# Altium PCB PCB2.PcbDoc (part 1 of 2)
Units mil, origin at the board's own origin, x right, y up, seen from the top; angles counter-clockwise.
Board outline 3622.05 x 2165.35 mil, 4 copper layers (Top Layer, GND, Sign, Bottom Layer), stack 41.556 mil thick; 166 components, 110 nets, 600 pads, 640 vias.
Unrouted connection lines stored in the file: 2.
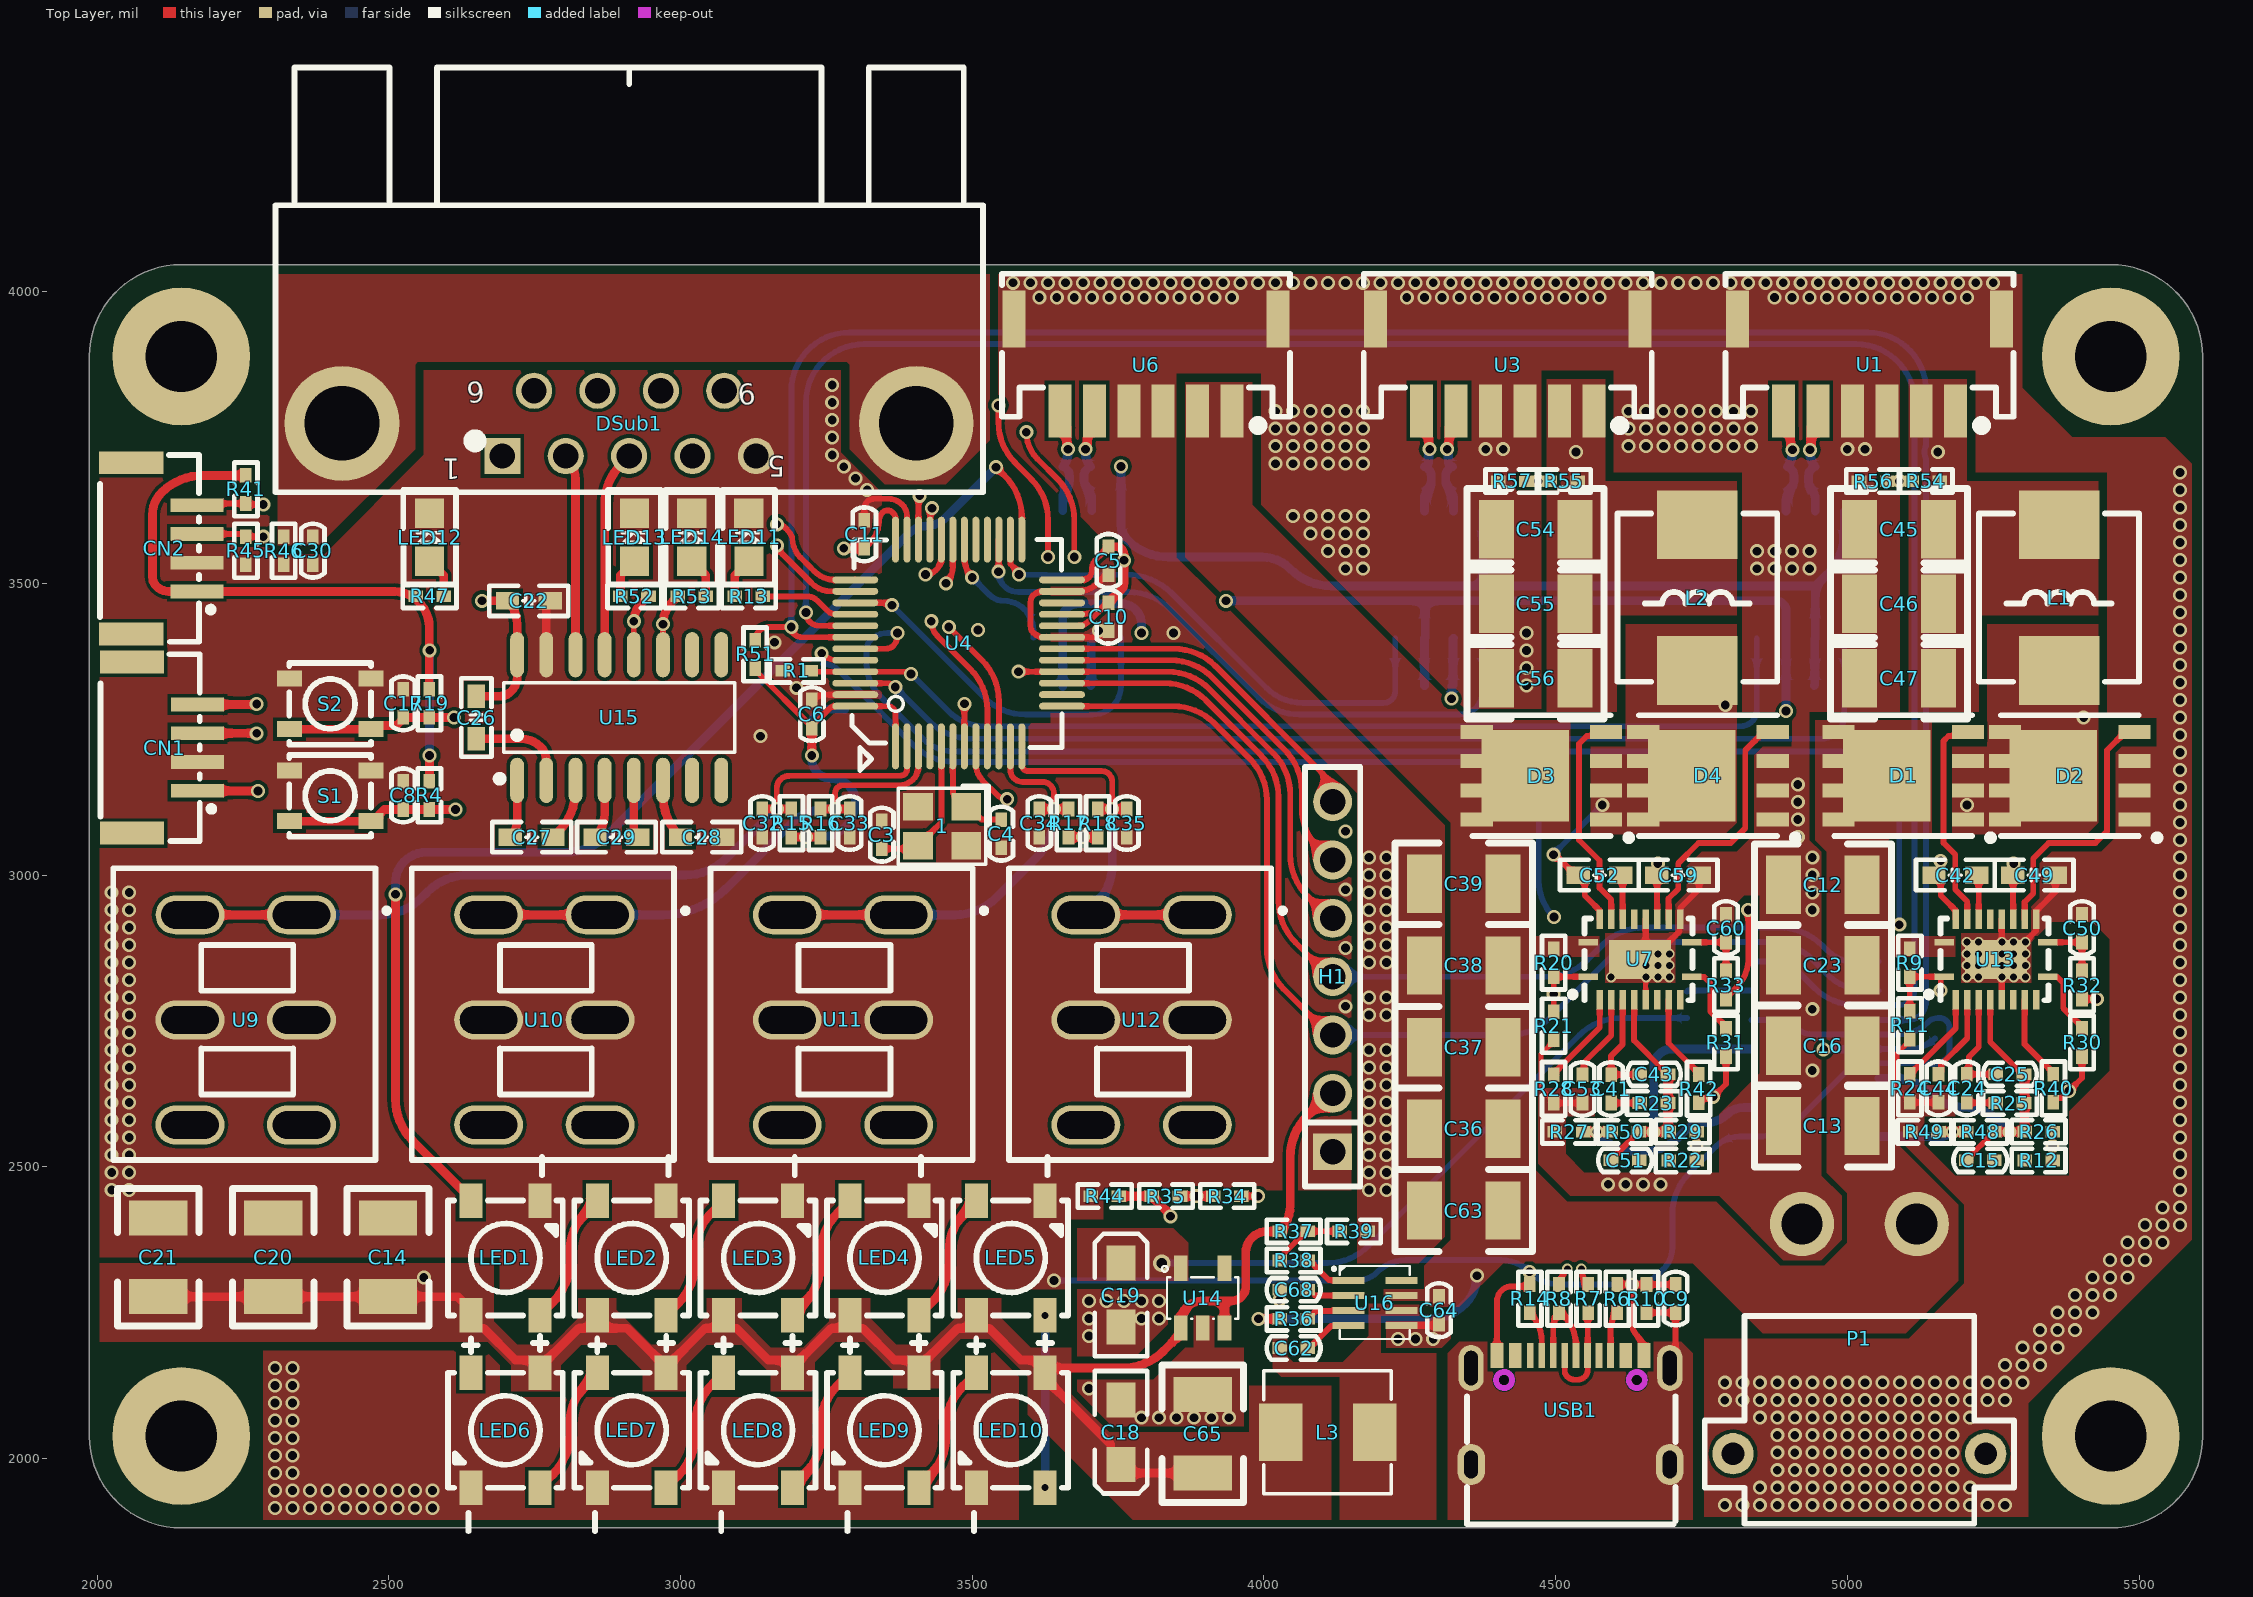
[diagram p0: Top Layer view]
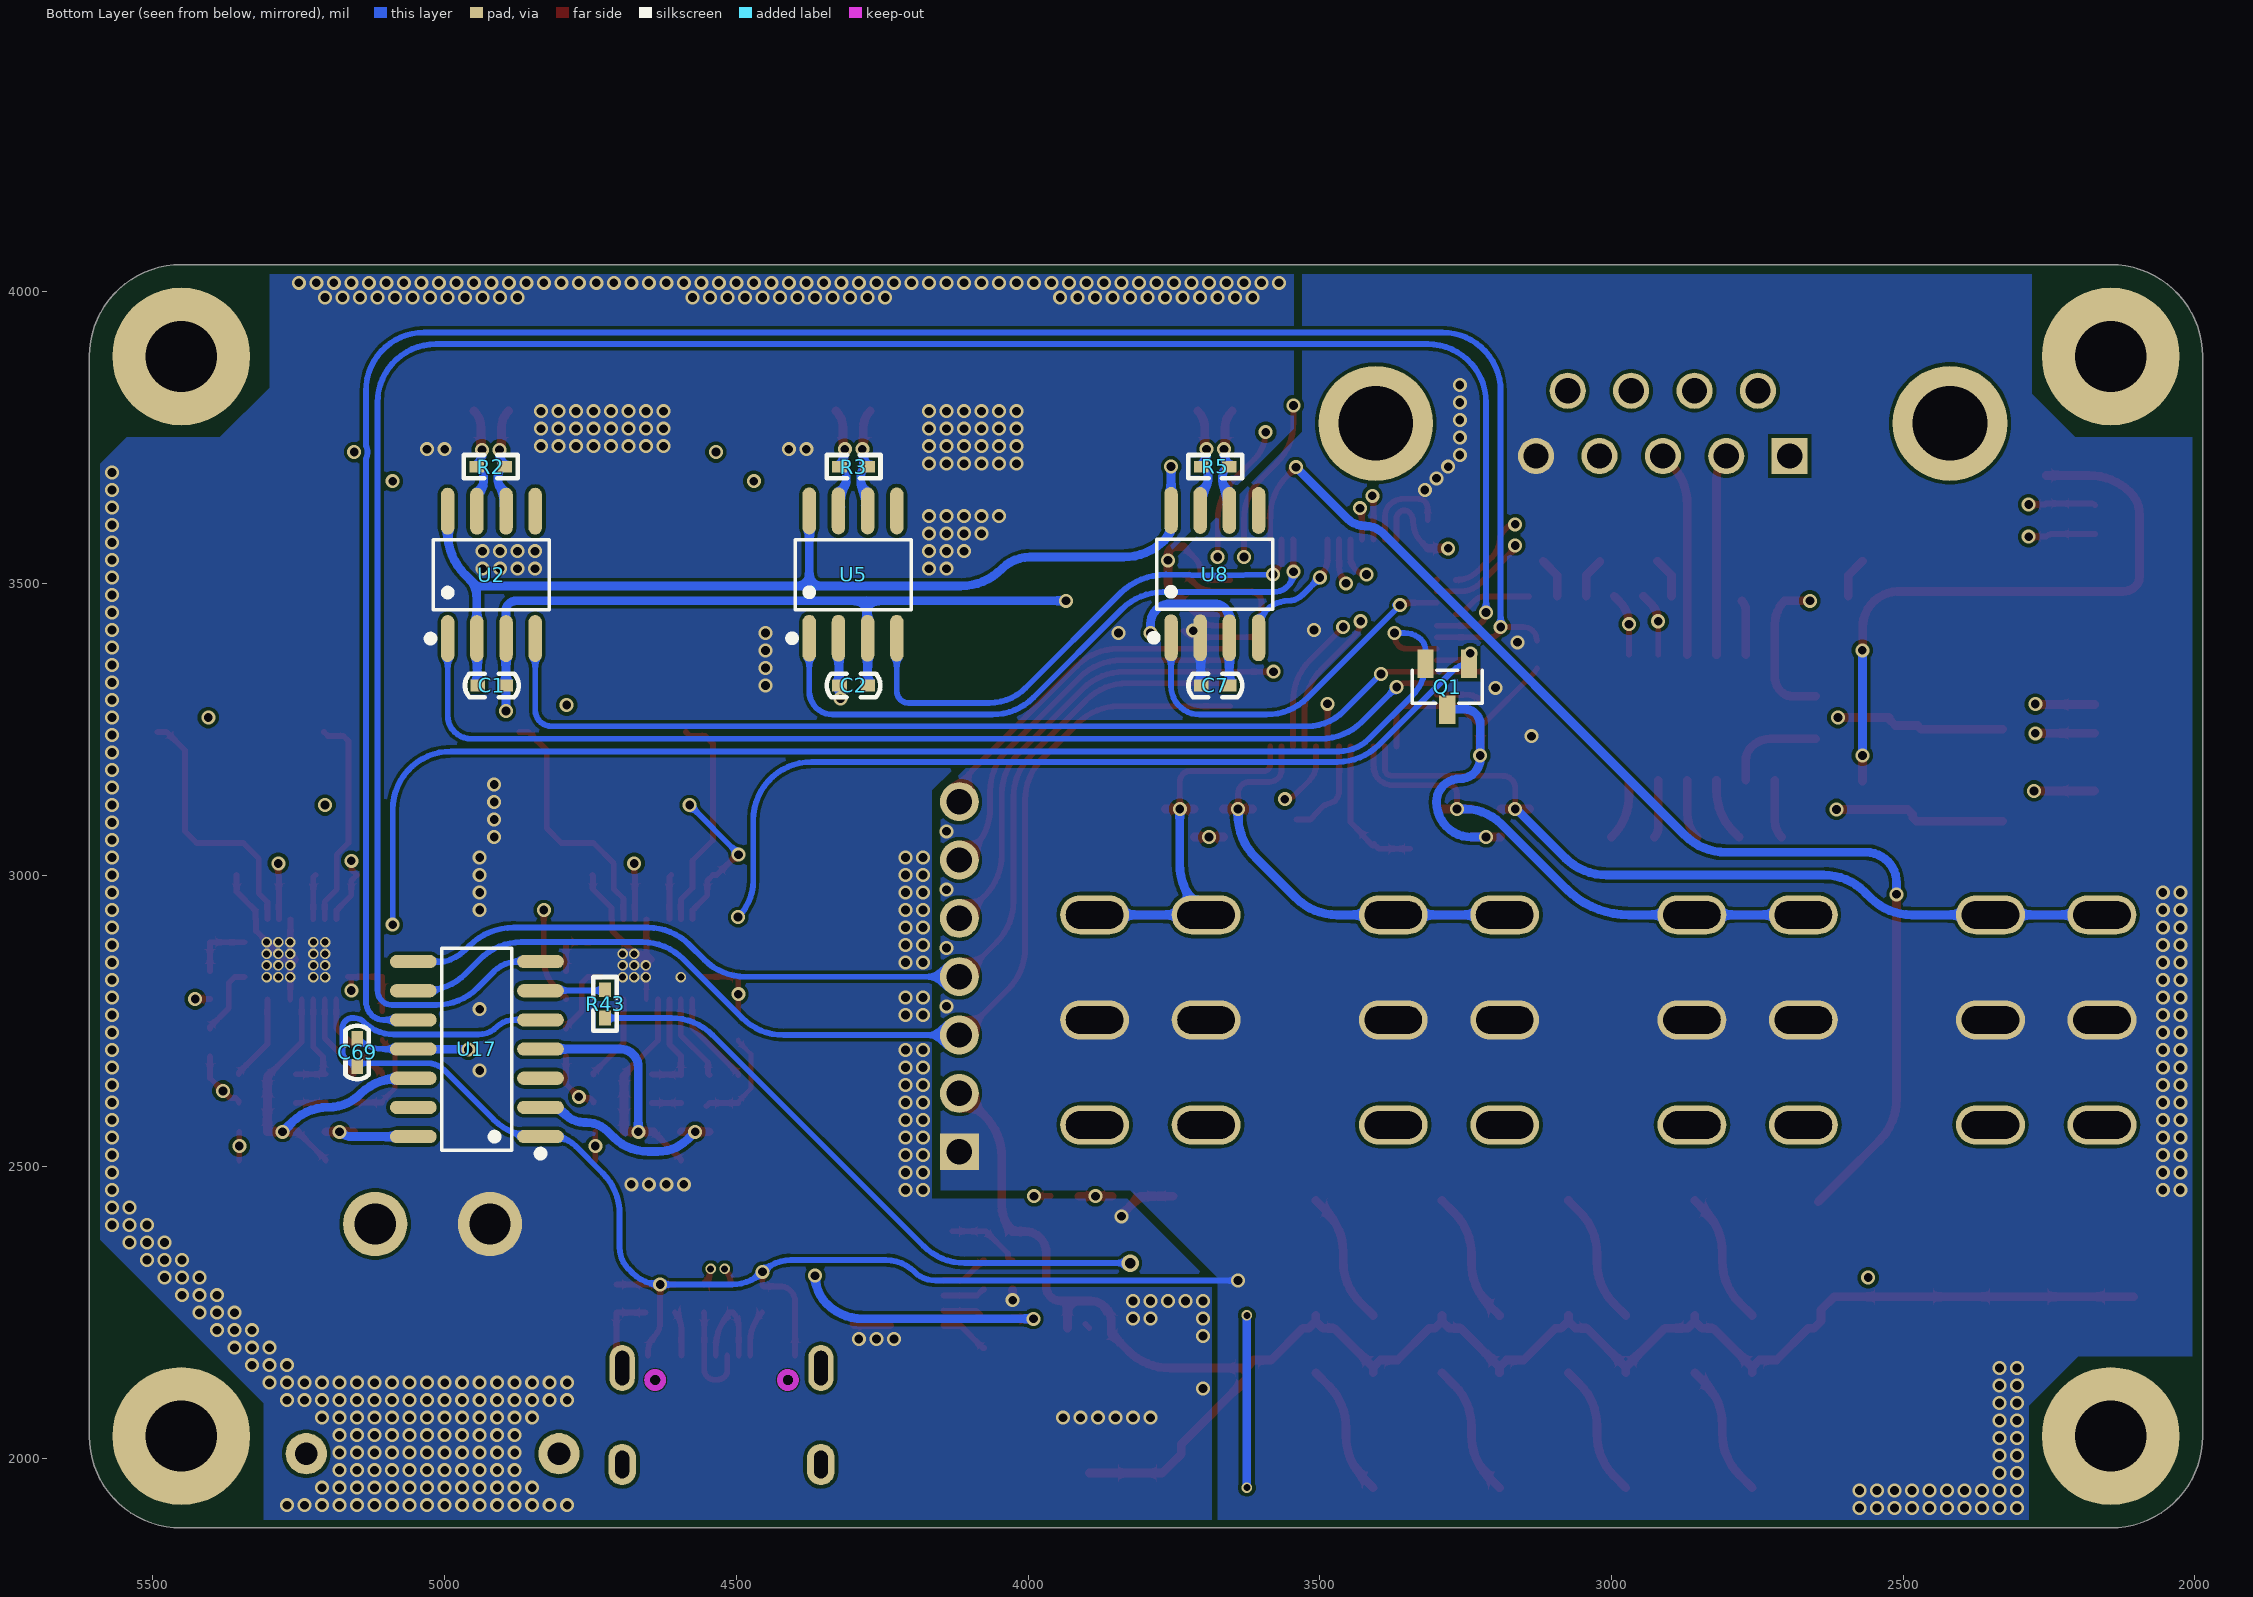
[diagram p1: Bottom Layer view, seen from below]
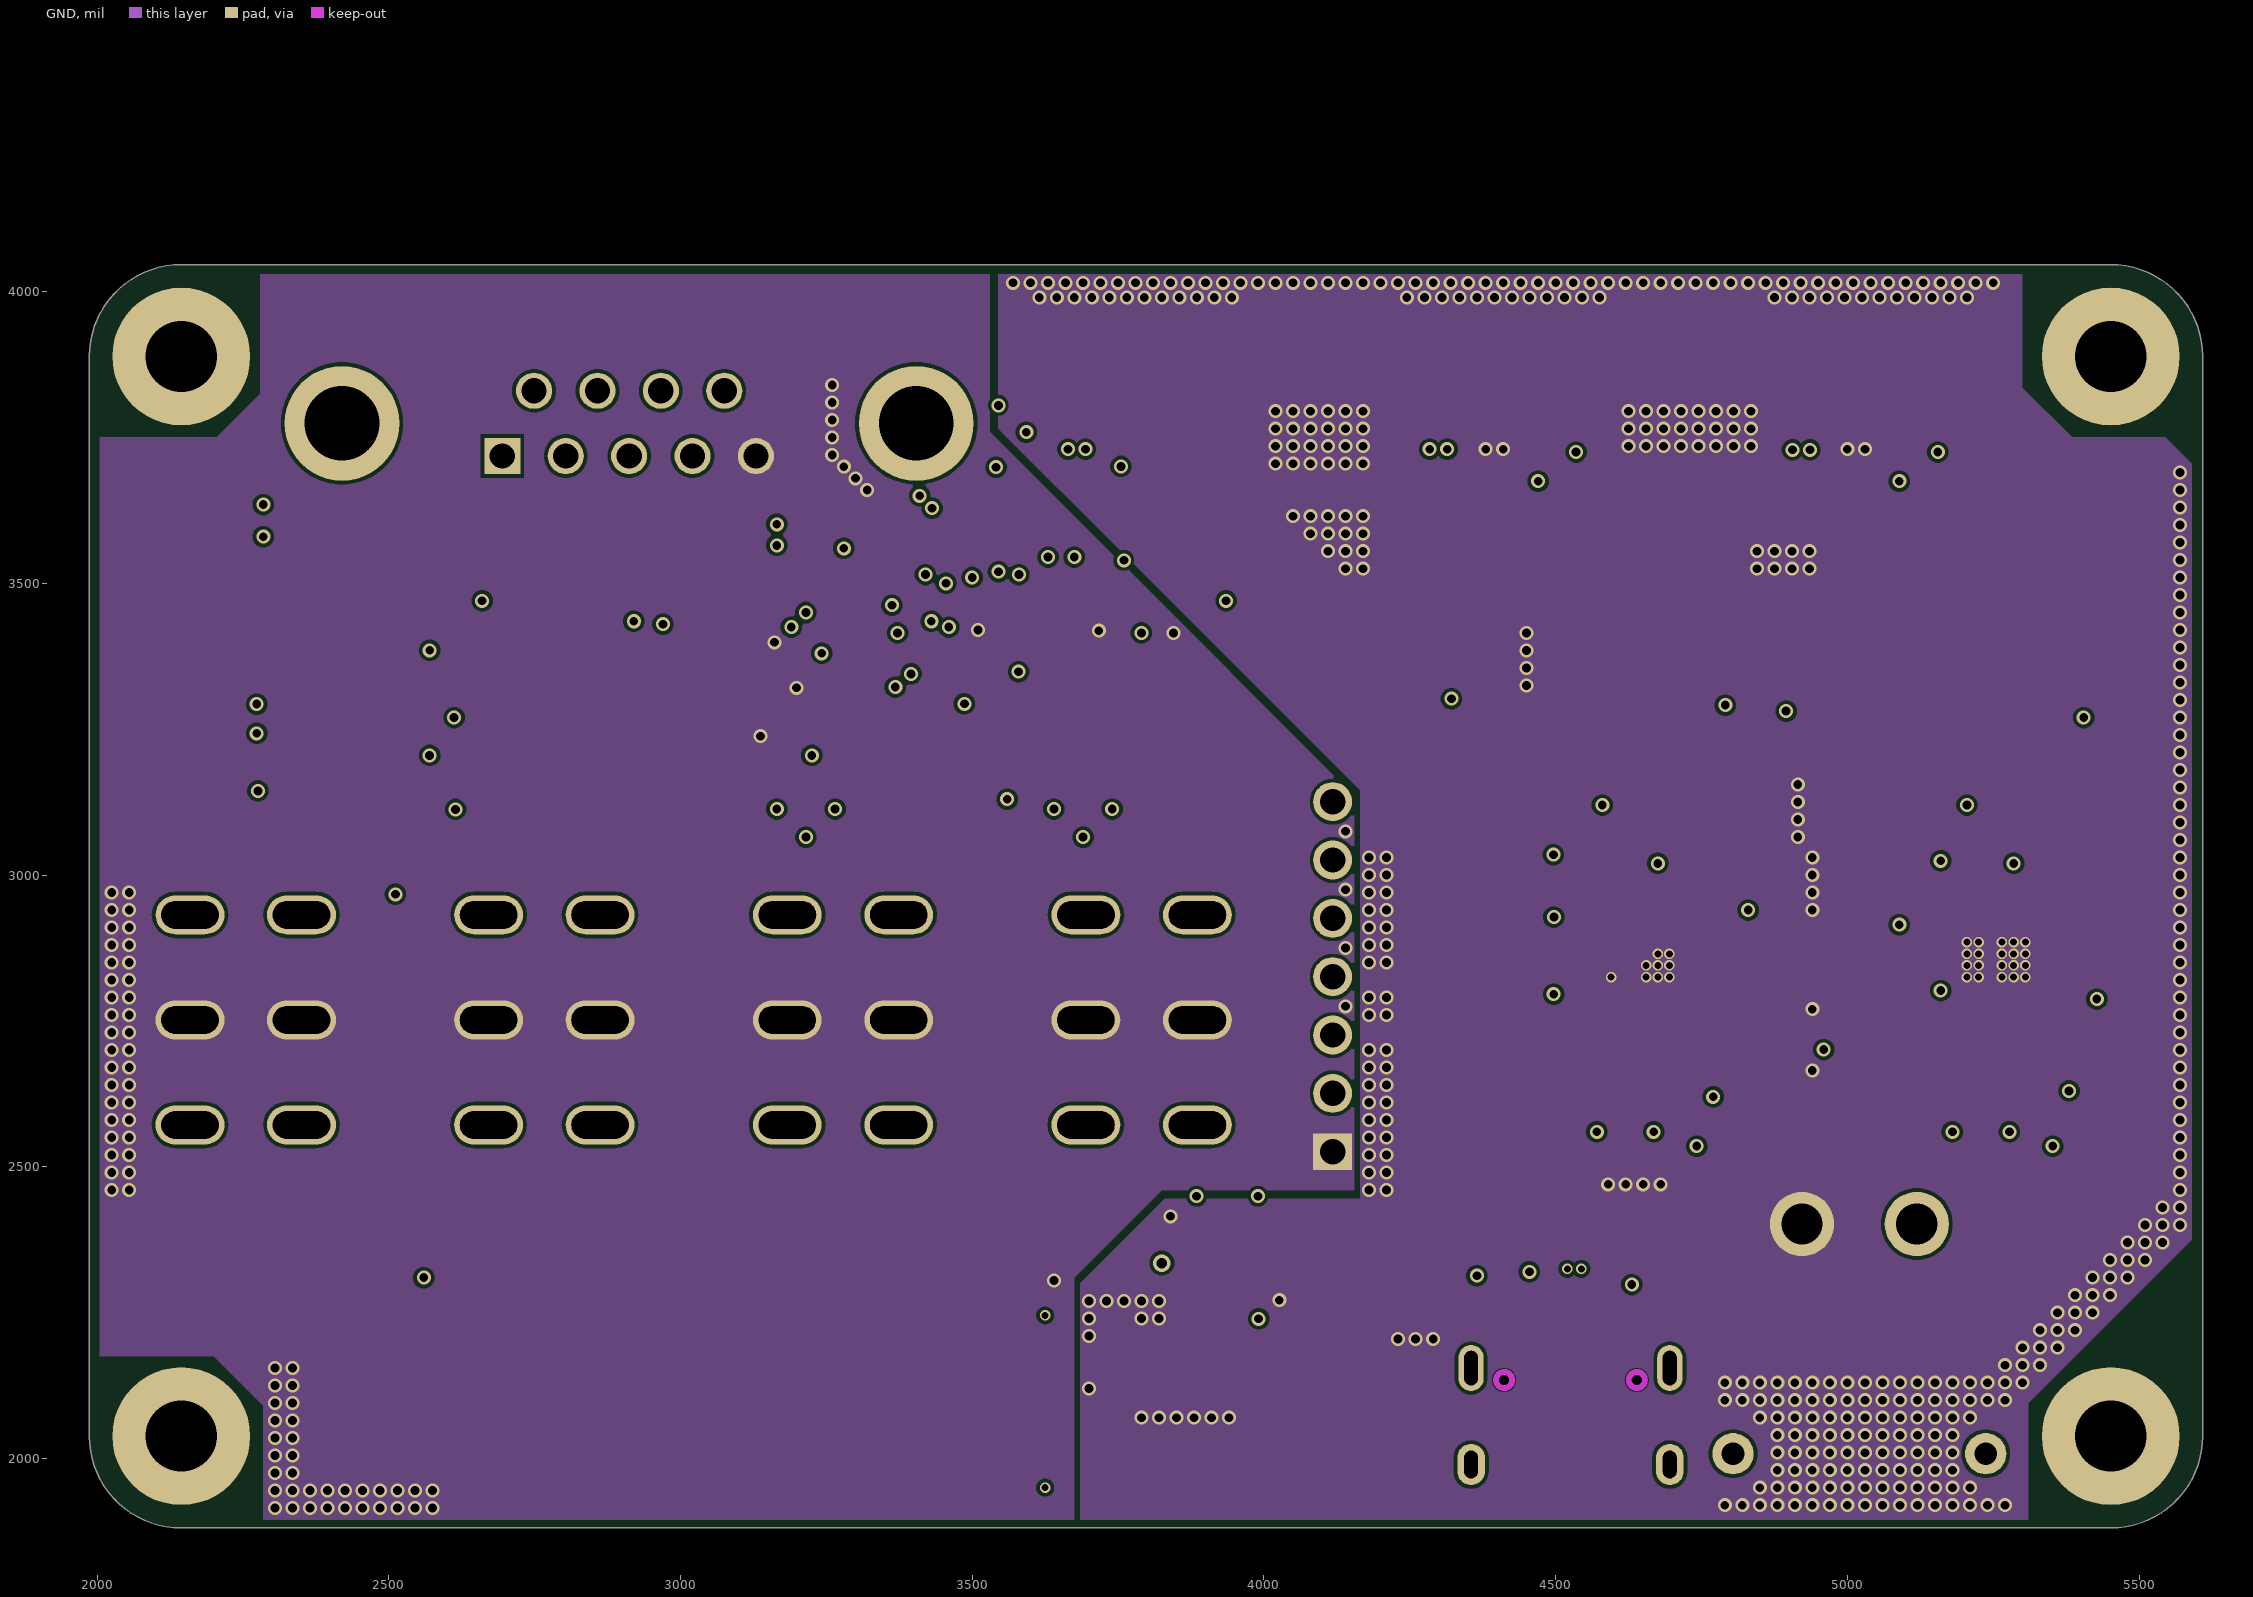
[diagram p2: GND]
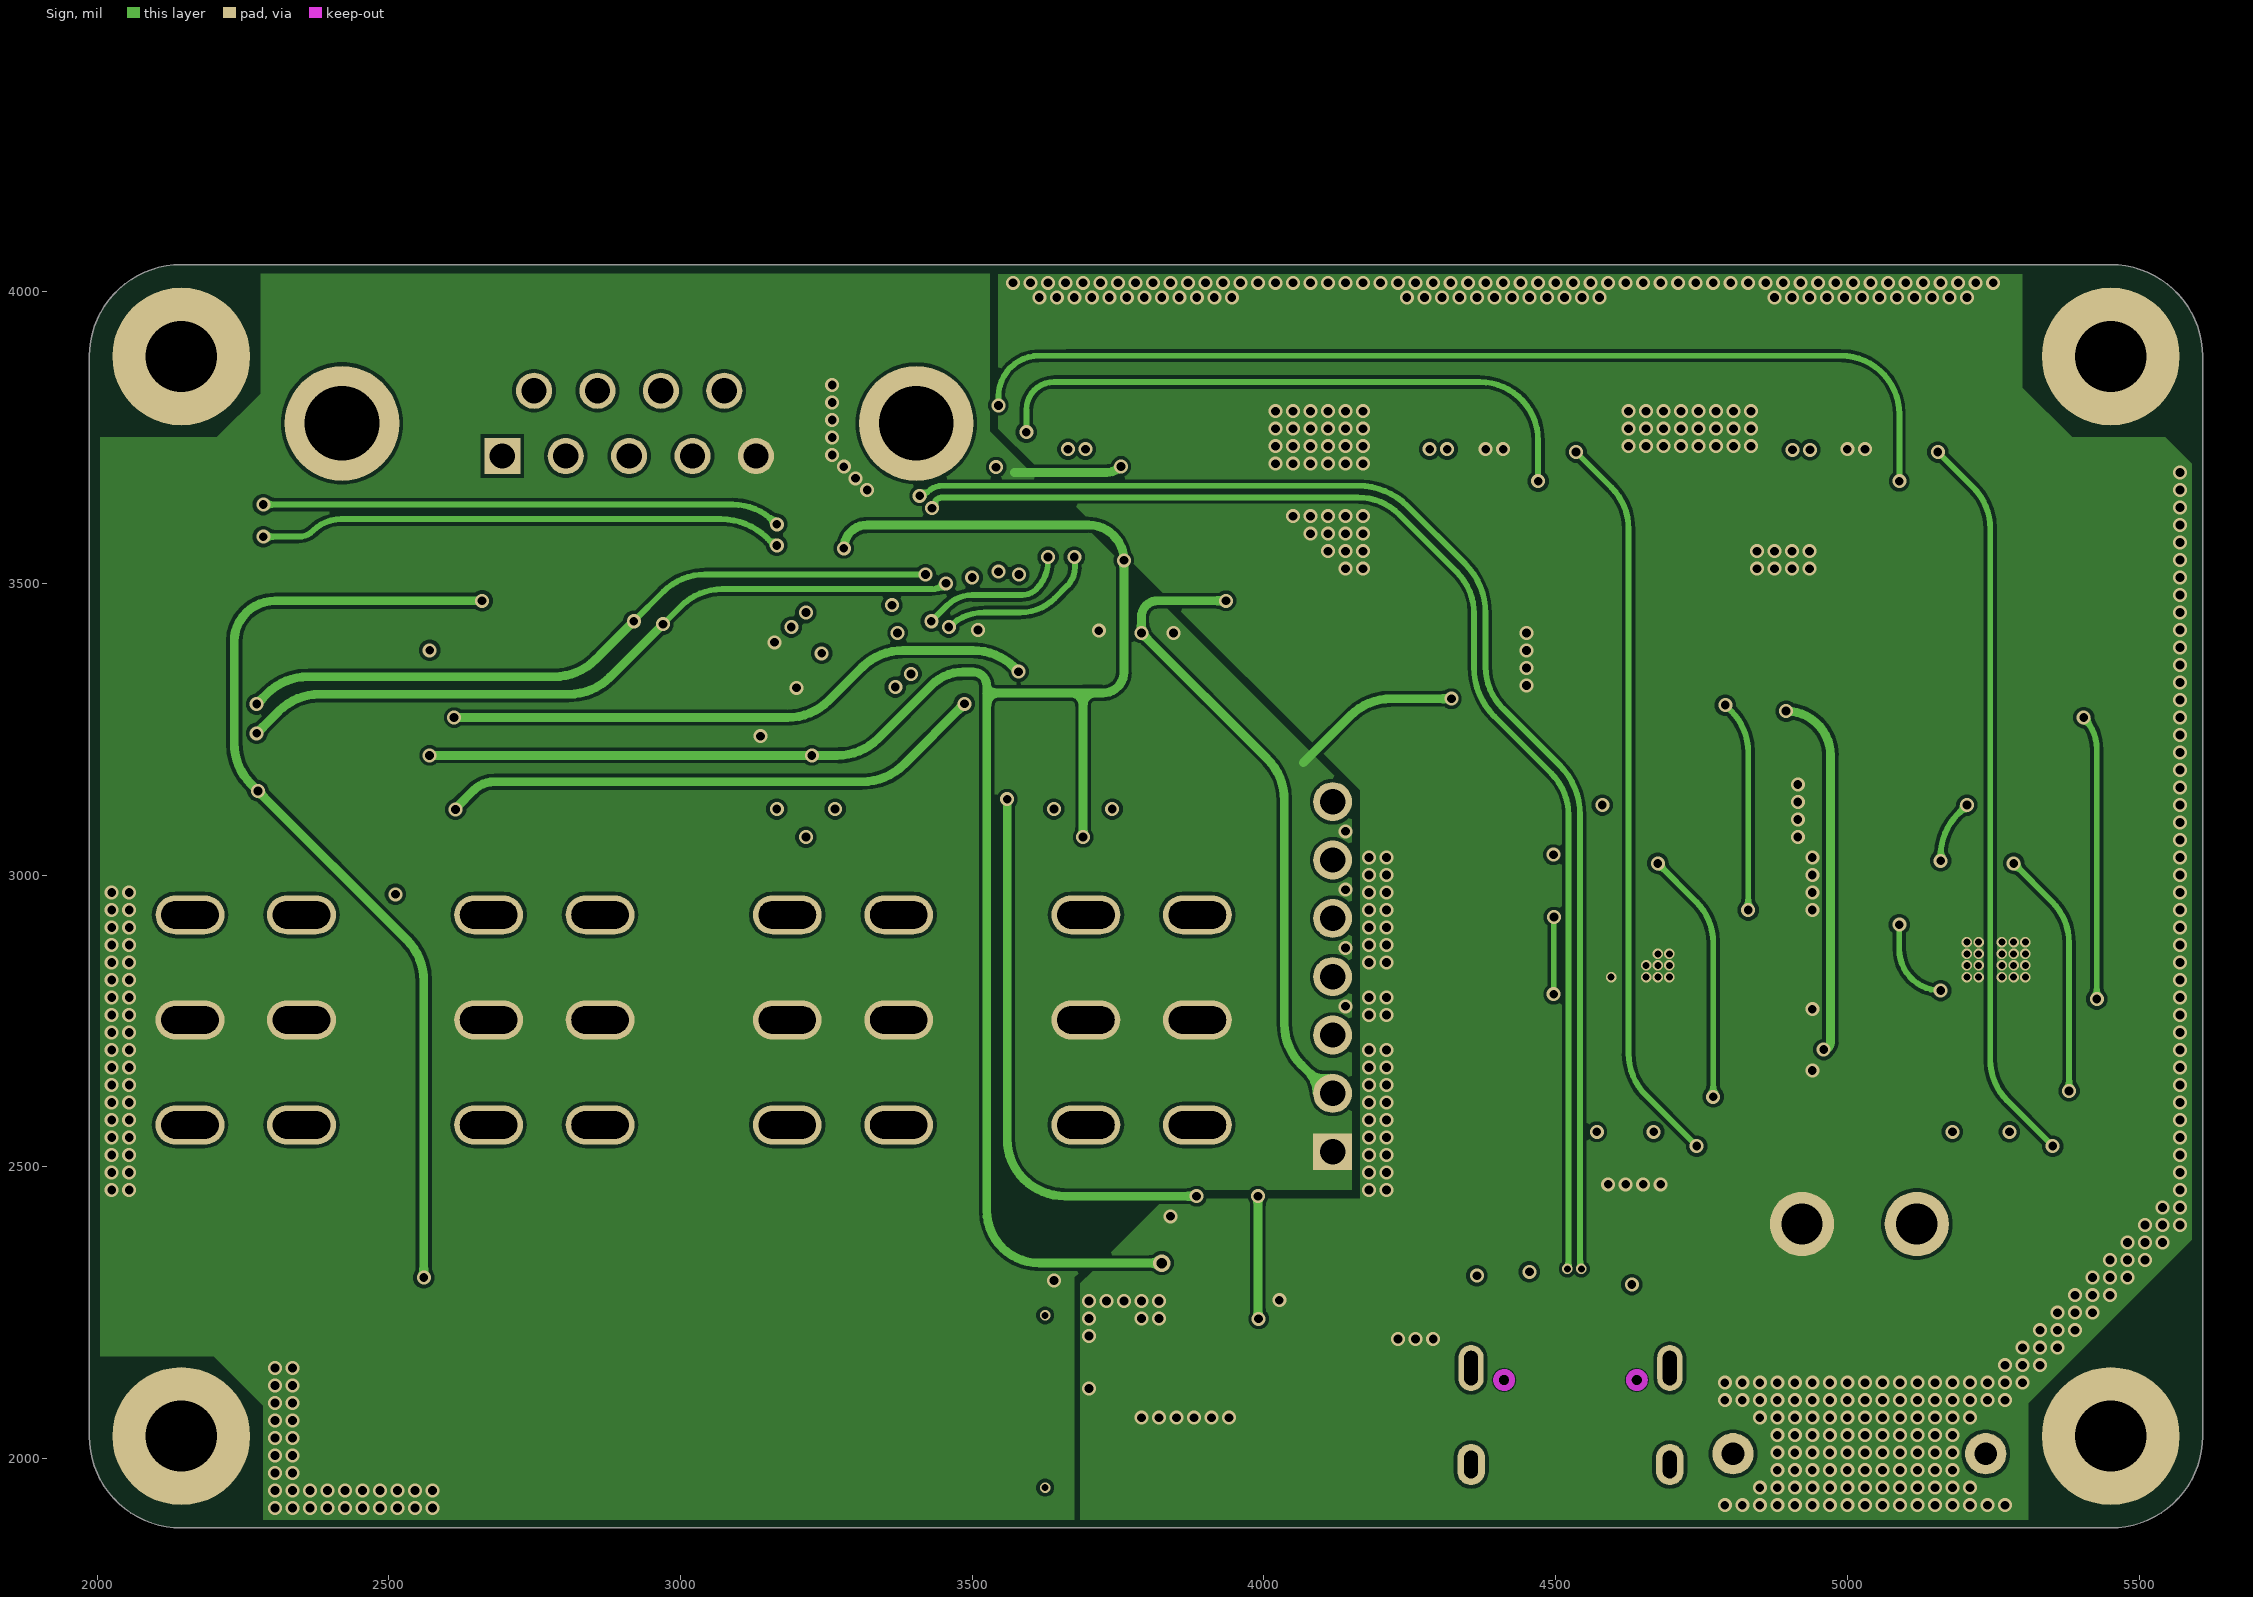
[diagram p3: Sign]
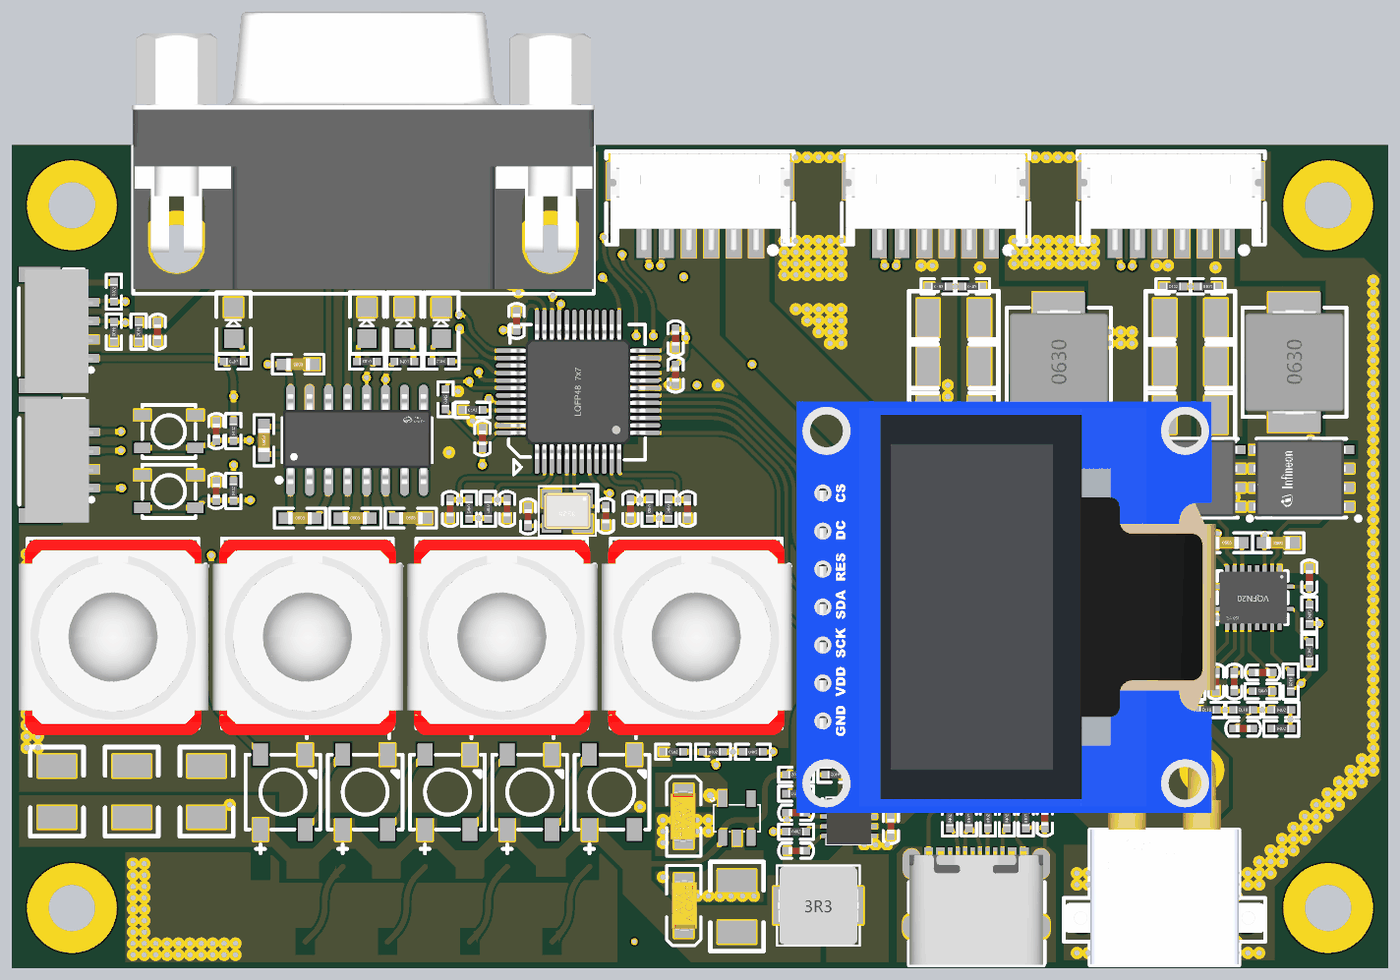
[diagram p5: 3D render of the assembled board from above, using the file's embedded part models]
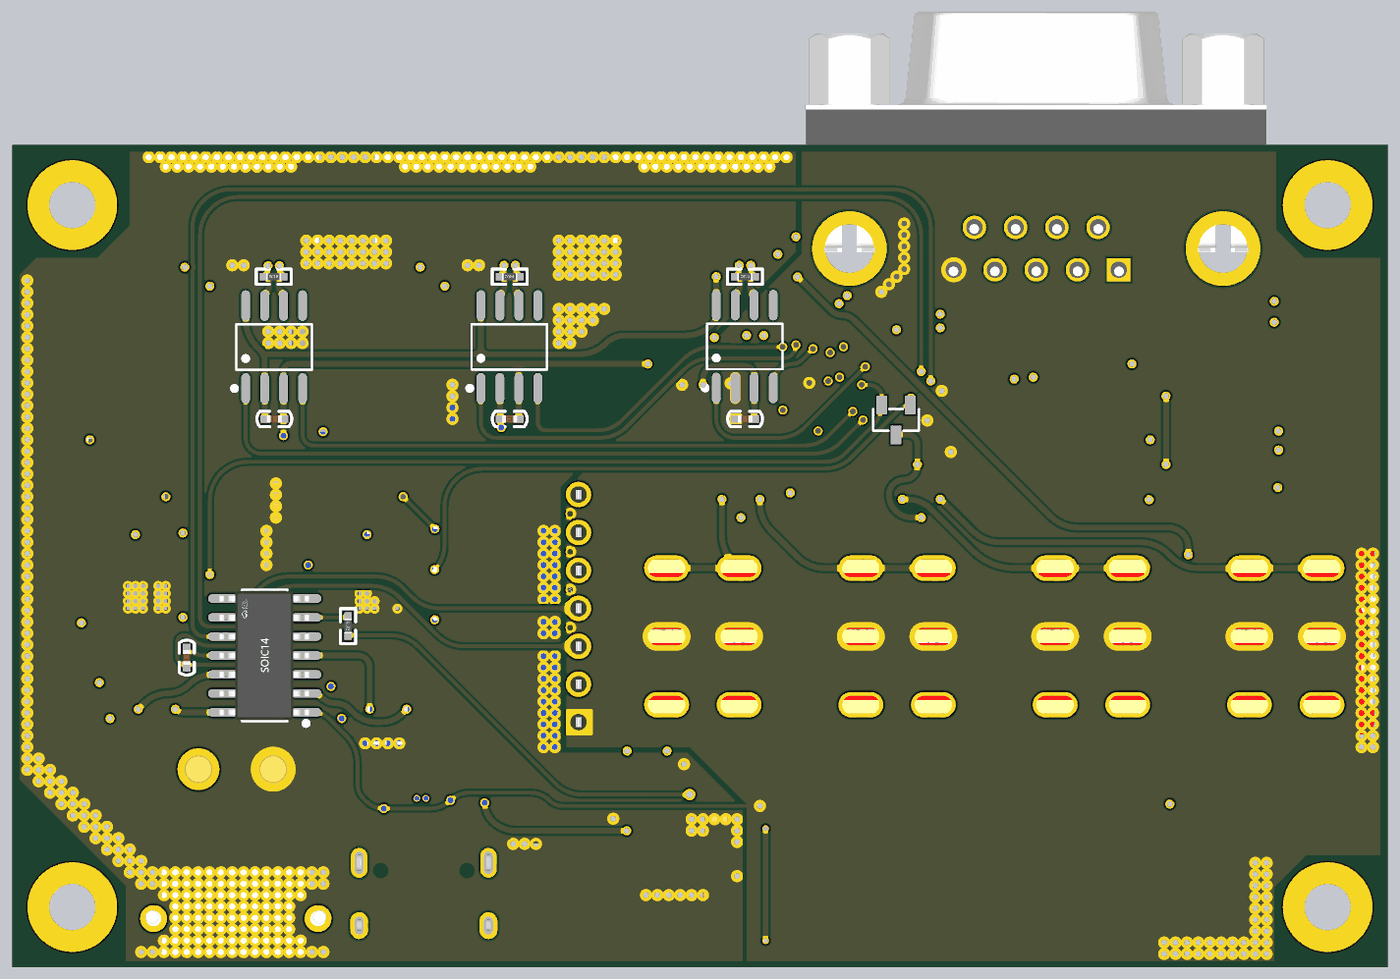
[diagram p6: 3D render of the assembled board from below, using the file's embedded part models]

## Layer stack, top to bottom
Top Solder: solder mask 0.4, Solder Resist, Dk 3.5
Top Layer: signal copper 1.4
Dielectric 2: prepreg 12, PP-006, Dk 4.1
GND: signal copper 1.378
Dielectric 1: dielectric 12, FR-4, Dk 4.8
Sign: signal copper 1.378
Dielectric 3: prepreg 12, PP-006, Dk 4.1
Bottom Layer: signal copper 1.4
Bottom Solder: solder mask 0.4, Solder Resist, Dk 3.5

## Board outline
5451.42,1880.91 2144.33,1880.91 cw(c2144.33,2038.39) 1986.85,2038.39 1986.85,3888.78 cw(c2144.33,3888.78) 2144.33,4046.26 5451.42,4046.26 cw(c5451.42,3888.78) 5608.9,3888.78 5608.9,2038.39 cw(c5451.42,2038.39)

## Design rules (kind name [scope] priority, off if disabled: settings)
AssemblyTestpoint AssemblyTestpoint_1 [All] p2: testpointundercomponent=TRUE minsize=40 maxsize=100 preferedsize=60 minholesize=0 maxholesize=40 preferedholesize=32 testpointgrid=1 usegrid=TRUE gridtolerance=0.01 allowsidetop=TRUE allowsidebottom=TRUE
Clearance [All] p1: gap=6 ignorepadtopadclearanceinfootprint=FALSE
DiffPairsRouting [All] p1: maxlimit=10 minlimit=8 mostfreqgap=10 toplayer_minwidth=10 toplayer_maxwidth=15 toplayer_prefwidth=15 midlayer1_minwidth=10 midlayer1_maxwidth=15 midlayer1_prefwidth=15 midlayer2_minwidth=10 midlayer2_maxwidth=15 midlayer2_prefwidth=15 bottomlayer_minwidth=10 bottomlayer_maxwidth=15 bottomlayer_prefwidth=15 maxuncoupledlength=500
Height [All] p1: minheight=0 maxheight=5000 prefheight=500
HoleSize [All] p1: absolutevalues=TRUE maxlimit=400 minlimit=1 maxpercent=80.000 minpercent=20.000
HoleToHoleClearance [All] p1: gap=5 allowstackedmicrovias=TRUE
MinimumSolderMaskSliver [All] p1: minsoldermaskwidth=0
NetAntennae [InNet('No Net')] p1: netantennaetolerance=0
PlaneConnect [All] p1: planeconnectstyle=Direct reliefexpansion=20 reliefentries=4 reliefconductorwidth=10 reliefairgap=10
PolygonConnect [All] p1: connectstyle=Direct reliefconductorwidth=10 reliefentries=4 polygonreliefangle="90 Angle" airgapwidth=10
RoutingVias [All] p1: holewidth=15 width=24 viastyle="Through Hole" minholewidth=12 minwidth=18 maxholewidth=30 maxwidth=50
SilkToSilkClearance [All] p1: silktosilkclearance=0
SilkToSolderMaskClearance [IsPad] p1: minsilkscreentomaskgap=0 clearancetoexposedcopper=TRUE
SolderMaskExpansion [All] p1: expansion=4 istentingtop=FALSE
UnRoutedNet [All] p1: checkbadconnections=TRUE
Width [All] p1: maxlimit=15 minlimit=8 preferedwidth=10
20 further rules are at their usual default settings.

## Classes and differential pairs
component class Power: C12 C13 C15 C16 C18 C19 C22 C23 C24 C25 C26 C27 C28 C29 C30 C36 C37 C38 C39 C41 C42 C43 C44 C45 C46 C47 C49 C50 C51 C52 C53 C54 C55 C56 C59 C60 C62 C63 C64 C65 C68 C69 D1 D2 D3 D4 DSub1 L1 L2 L3 LED12 LED13 LED14 P1 Q1 R9 R11 R12 R20 R21 R22 R23 R24 R25 R26 R27 R28 R29 R30 R31 R32 R33 R36 R37 R38 R39 R40 R42 R43 R44 R46 R47 R48 R49 R50 R51 R52 R53 U7 U13 U14 U15 U16 U17
component class Main: 1 C1 C2 C3 C4 C5 C6 C7 C8 C9 C10 C11 C14 C17 C20 C21 C32 C33 C34 C35 CN1 CN2 H1 LED1 LED2 LED3 LED4 LED5 LED6 LED7 LED8 LED9 LED10 LED11 R1 R2 R3 R4 R5 R6 R7 R8 R10 R13 R14 R15 R16 R17 R18 R19 R34 R35 R41 R45 R54 R55 R56 R57 S1 S2 U1 U2 U3 U4 U5 U6 U8 U9 U10 U11 U12 USB1
differential pair USB: +USB_P -USB_N
differential pair FDCAN3: +FDCAN3_P -FDCAN3_N
differential pair FDCAN2: +FDCAN2_P -FDCAN2_N
differential pair FDCAN1: +FDCAN1_P -FDCAN1_N

## Components (designator, comment, footprint, x,y, rotation, side; value= is the part's Value field where it differs from the comment)
1 "3225贴片晶振" OSC-3225-4P 3448.46,3083.85 r180 top value=16M
C1 "100nF" c0402 4895,3325 r0 bottom
C2 "100nF" c0402 4275,3325 r0 bottom
C3 "15pF" c0402 3345,3093.2 r270 top
C4 "15pF" c0402 3550,3046.8 r90 top
C5 "100nF" c0402 3733.46,3514.35 r90 top
C6 "100nF" c0402 3225,3300 r270 top
C7 "100nF" c0402 3655,3325 r0 bottom
C8 "100nF" c0402 2524.56,3160.59 r270 top
C9 "100nF" c0402 4705.63,2250 r90 top
C10 "100nF" c0402 3733.46,3418.65 r90 top
C11 "100nF" c0402 3315,3560 r90 top
C12 "10uF" 1210 4890.39,2983.27 r0 top
C13 "10uF" 1210 4890.39,2569.88 r0 top
C14 "10uF" 1210 2498.66,2412.4 r270 top
C15 "820pF" c0402 5252,2511 r180 top
C16 "10uF" 1210 4890.39,2707.68 r0 top
C17 "100nF" c0402 2524.56,3318.39 r270 top
C18 "10uF" 3216 3755,1990 r270 top
C19 "10uF" 3216 3755,2335 r90 top
C20 "10uF" 1210 2301.81,2412.4 r270 top
C21 "10uF" 1210 2104.96,2412.4 r270 top
C22 "1uF" "C 0603_M" 2740,3470 r180 top
C23 "10uF" 1210 4890.39,2845.47 r0 top
C24 "5.6nF" c0402 5204.34,2658.46 r270 top
C25 "82pF" c0402 5302.77,2658.46 r180 top
C26 "1uF" "C 0603_M" 2650,3270 r90 top
C27 "1uF" "C 0603_M" 2745,3065 r0 top
C28 "1uF" "C 0603_M" 3036.5,3065 r0 top
C29 "1uF" "C 0603_M" 2890,3065 r0 top
C30 "100nF" c0402 2370,3580 r270 top
C32 "100nF" c0402 3140,3065 r90 top
C33 "100nF" c0402 3290,3065 r90 top
C34 "100nF" c0402 3615,3065 r90 top
C35 "100nF" c0402 3765,3065 r90 top
C36 "10uF" 1210 4275,2565 r0 top
C37 "10uF" 1210 4275,2705 r0 top
C38 "10uF" 1210 4275,2845 r0 top
C39 "10uF" 1210 4275,2985 r0 top
C41 "5.6nF" c0402 4595.12,2657.45 r270 top
C42 "100nF" "C 0603_M" 5185,3000 r0 top
C43 "82pF" c0402 4692.53,2658.46 r180 top
C44 "47nF" c0402 5156.14,2658.46 r270 top
C45 "22uF" 1210 5021.14,3592.72 r0 top
C46 "22uF" 1210 5021.14,3464.92 r0 top
C47 "22uF" 1210 5021.14,3337.13 r0 top
C49 "2.2uF" "C 0603_M" 5320,3000 r180 top
C50 "12pF" c0402 5402.2,2933.04 r270 top
C51 "820pF" c0402 4643,2511 r180 top
C52 "100nF" "C 0603_M" 4575,3000 r0 top
C53 "47nF" c0402 4545.91,2657.45 r270 top
C54 "22uF" 1210 4398.27,3592.72 r0 top
C55 "22uF" 1210 4398.27,3464.92 r0 top
C56 "22uF" 1210 4398.27,3337.13 r0 top
C59 "2.2uF" "C 0603_M" 4710,3000 r180 top
C60 "12pF" c0402 4791.97,2933.04 r270 top
C62 "100nF" c0402 4075,2189.37 r180 top
C63 "10uF" 1210 4275,2425 r0 top
C64 "100nF" c0402 4300,2230 r90 top
C65 "10uF" 1210 3895,2110 r270 top
C68 "100nF" c0402 4026.8,2289.37 r0 top
C69 "100nF" c0402 5150,2671.8 r90 bottom
CN1 "卧式UART" CONN-SMD_4P-P1.25_GH1.25-4P 2116.1,3218.35 r270 top
CN2 "卧式STLINK" CONN-SMD_4P-P1.25_GH1.25-4P 2115,3560 r270 top
D1 "CSD18540" pg-tdson-8 4986.62,3120.28 r90 top
D2 "CSD18540" pg-tdson-8 5272.05,3120.28 r90 top
D3 "CSD18540" pg-tdson-8 4366.54,3120.28 r90 top
D4 "CSD18540" pg-tdson-8 4651.97,3120.28 r90 top
DSub1 "DMR-9S" DSUB-TH_DMR-9S 2912.01,4022.68 r90 top locked
H1 "PM254V-11-07-H85" HDR-TH_7P-P2.54-V-F 4117.83,2825.79 r90 top locked
L1 "5.6uH" L-SMD-0630 5362.83,3475.39 r90 top
L2 "5.6uH" L-SMD-0630 4742.76,3475.39 r90 top
L3 "22uH" IND-SMD_L5.4-W5.2 4109.29,2045 r0 top value=10uH
LED1 "XL-5050RGBC-WS2812B" LED-SMD_4P-L5.0-W5.0-BL_XL-5050RGBC 1980.55,2927.24 r0 top
LED2 "XL-5050RGBC-WS2812B" LED-SMD_4P-L5.0-W5.0-BL_XL-5050RGBC 2197.09,2927.24 r0 top
LED3 "XL-5050RGBC-WS2812B" LED-SMD_4P-L5.0-W5.0-BL_XL-5050RGBC 2413.62,2927.24 r0 top
LED4 "XL-5050RGBC-WS2812B" LED-SMD_4P-L5.0-W5.0-BL_XL-5050RGBC 2630.15,2927.24 r0 top
LED5 "XL-5050RGBC-WS2812B" LED-SMD_4P-L5.0-W5.0-BL_XL-5050RGBC 2846.7,2927.24 r0 top
LED6 "XL-5050RGBC-WS2812B" LED-SMD_4P-L5.0-W5.0-BL_XL-5050RGBC 3419.22,1464.8 r180 top
LED7 "XL-5050RGBC-WS2812B" LED-SMD_4P-L5.0-W5.0-BL_XL-5050RGBC 3635.75,1464.8 r180 top
LED8 "XL-5050RGBC-WS2812B" LED-SMD_4P-L5.0-W5.0-BL_XL-5050RGBC 3852.28,1464.8 r180 top
LED9 "XL-5050RGBC-WS2812B" LED-SMD_4P-L5.0-W5.0-BL_XL-5050RGBC 4068.82,1464.8 r180 top
LED10 "XL-5050RGBC-WS2812B" LED-SMD_4P-L5.0-W5.0-BL_XL-5050RGBC 4285.36,1464.8 r180 top
LED11 "LED" led0805 3117.2,3537.7 r90 top
LED12 "LED" led0805 2570,3537.7 r90 top
LED13 "LED" led0805 2921.2,3537.7 r90 top
LED14 "LED" led0805 3019.4,3537.7 r90 top
P1 "XT30PW-M" XT30PW-M 5020.63,2205 r0 top
Q1 "SS8050" SOT-23-3_L2.9-W1.3-P1.90-LS2.4-BR 3436.45,3103.65 r90 bottom
R1 "10KΩ" R0402 3175,3350 r0 top
R2 "120Ω" R0402 4896.8,3700 r0 bottom
R3 "120Ω" R0402 4275,3700 r0 bottom
R4 "10KΩ" R0402 2569.56,3112.39 r90 top
R5 "120Ω" R0402 3655,3700 r0 bottom
R6 "5.1KΩ" R0402 4605.63,2250 r90 top
R7 "22Ω" R0402 4555.63,2250 r90 top
R8 "22Ω" R0402 4505.63,2250 r90 top
R9 "56KΩ" R0402 5106.93,2873.99 r270 top
R10 "10KΩ" R0402 4655.63,2250 r90 top
R11 "11KΩ" R0402 5106.93,2718.53 r90 top
R12 "100Ω" R0402 5303.78,2510.83 r0 top
R13 "2KΩ" R0402 3141.2,3477.7 r180 top
R14 "5.1KΩ" R0402 4455.63,2250 r90 top
R15 "10KΩ" R0402 3190,3113.2 r270 top
R16 "10KΩ" R0402 3240,3113.2 r270 top
R17 "10KΩ" R0402 3665,3113.2 r270 top
R18 "10KΩ" R0402 3715,3113.2 r270 top
R19 "10KΩ" R0402 2569.56,3270.19 r90 top
R20 "80.6KΩ" R0402 4496.69,2873.99 r270 top
R21 "7.5KΩ" R0402 4496.69,2717.52 r90 top
R22 "100Ω" R0402 4693.54,2510.83 r0 top
R23 "10KΩ" R0402 4692.53,2609.25 r180 top
R24 "23.7KΩ" R0402 5106.93,2658.46 r270 top
R25 "10KΩ" R0402 5302.77,2609.25 r180 top
R26 "56KΩ" R0402 5303.78,2560.04 r0 top
R27 "4KΩ" R0402 4547,2560 r180 top
R28 "23.7KΩ" R0402 4496.69,2657.45 r270 top
R29 "56KΩ" R0402 4693.54,2560.04 r0 top
R30 "20KΩ" R0402 5402.2,2737.2 r270 top
R31 "20KΩ" R0402 4791.97,2737.2 r270 top
R32 "499Ω" R0402 5402.2,2787.43 r90 top
R33 "499Ω" R0402 4791.97,2787.43 r90 top
R34 "10KΩ" R0402 3913.02,2449.68 r0 top
R35 "1KΩ" R0402 3808.02,2449.68 r0 top
R36 "10KΩ" R0402 4026.8,2239.37 r0 top
R37 "43KΩ" R0402 4075,2389.37 r180 top
R38 "51KΩ" R0402 4075,2339.37 r180 top
R39 "8.2KΩ" R0402 4178.2,2389.37 r180 top
R40 "100KΩ" R0402 5352.99,2658.46 r270 top
R41 "10KΩ" R0402 2255,3636.8 r90 top
R42 "100KΩ" R0402 4745,2658.2 r270 top
R43 "10KΩ" R0402 4725,2803.2 r270 bottom
R44 "0Ω" R0402 3703.02,2449.68 r0 top
R45 "10KΩ" R0402 2255,3580 r270 top
R46 "10KΩ" R0402 2320,3580 r270 top
R47 "2KΩ" R0402 2546,3477.7 r0 top
R48 "0" R0402 5252,2560 r180 top
R49 "2KΩ" R0402 5156.2,2560 r180 top
R50 "0KΩ" R0402 4642.2,2560 r180 top
R51 "10KΩ" R0402 3128,3354 r90 top
R52 "2KΩ" R0402 2945.2,3477.7 r180 top
R53 "2KΩ" R0402 2995.2,3477.7 r0 top
R54 "10KΩ" R0402 5110,3675 r0 top
R55 "10KΩ" R0402 4490,3675 r0 top
R56 "1KΩ" R0402 5020,3675 r0 top
R57 "1KΩ" R0402 4401.8,3675 r0 top
S1 "SW" KEY_SMD 2399.56,3135.59 r180 top
S2 "SW" KEY_SMD 2399.56,3293.39 r180 top
U1 "ZX-ZH1.5-6PWT" CONN-SMD_6P-P1.50_ZX-ZH1.5-6PWT 5038.04,3874.25 r180 top
U2 "SN65HVD1050DR" SOIC-8_L4.9-W3.9-P1.27-LS6.0-BL 4919.76,3514.45 r180 bottom
U3 "ZX-ZH1.5-6PWT" CONN-SMD_6P-P1.50_ZX-ZH1.5-6PWT 4417.95,3874.25 r180 top
U4 "STM32G474CET6" LQFP-48 2011.77,2292.72 r90 top
U5 "SN65HVD1050DR" SOIC-8_L4.9-W3.9-P1.27-LS6.0-BL 4300,3515 r180 bottom
U6 "ZX-ZH1.5-6PWT" CONN-SMD_6P-P1.50_ZX-ZH1.5-6PWT 3797.87,3874.25 r180 top
U7 "LM25145RGYR" VQFN-20_L4.5-W3.5-P0.50-BL-EP 4644.33,2855.4 r0 top
U8 "SN65HVD1050DR" SOIC-8_L4.9-W3.9-P1.27-LS6.0-BL 3680,3515.85 r180 bottom
U9 "7208P1YZQI" SW-TH_6P-L12.7-W11.4-P4.70-LS4.8 2262.44,2761.73 r180 top locked
U10 "7208P1YZQI" SW-TH_6P-L12.7-W11.4-P4.70-LS4.8 2774.25,2761.73 r180 top locked
U11 "7208P1YZQI" SW-TH_6P-L12.7-W11.4-P4.70-LS4.8 3286.06,2761.73 r180 top locked
U12 "7208P1YZQI" SW-TH_6P-L12.7-W11.4-P4.70-LS4.8 3797.87,2761.73 r180 top locked
U13 "LM25145RGYR" VQFN-20_L4.5-W3.5-P0.50-BL-EP 5254.57,2855.31 r0 top
U14 "XC6201P332MR-HXY" SOT-23-5_L3.0-W1.7-P0.95-LS2.8-BR 3895,2275 r270 top
U15 "MAX232ESE+T" SOIC-16_L9.9-W3.9-P1.27-LS6.0-BL 2890,3270 r0 top
U16 "MP9943" "QFN-8 3x3" 4145,2304.96 r0 top
U17 "AD8402ARZ10-REEL" SOIC-14_L8.7-W3.9-P1.27-LS6.0-BL 4944.66,2701.67 r90 bottom
USB1 "TYPE-C 16PIN 2MD(073)" USB-C-SMD_TYPE-C-6PIN-2MD-073 4525.35,2083.15 r0 top

## Footprints (in the part's own frame and the unit in brackets; to place one, negate y for a bottom-side part, rotate by r counter-clockwise, add the part's x,y. Pads: shape width x height; smd on the part's side, far side on the other; paste and mask are expansions set on the pad)
1210 [mil]
  rect 60x100 smd: 1(0,0) 2(135,0)
  silkscreen extent -50,-70 185,70, body extent 4,-49 130,49, height 30
3216 [mil]
  rect 60x50 smd: 1(0,0) 2(-110,0)
  silkscreen extent -160,-45 50,45, body extent -122,-31 12,35, height 67
c0402 [mil]
  rect 25x20 smd: 1(0,0) 2(48.2,0)
  silkscreen extent -22,-20 70,20, body extent 5,-10 44,10, height 20
"C 0603_M" [mil] "无极性贴片电容"
  rect 40x30 smd: 1(-36.5,0) 2(36.5,0)
  silkscreen extent -68,-26 68,26, body extent -31,-16 31,16, height 32
CONN-SMD_4P-P1.25_GH1.25-4P [mm]
  rect 0.6x2.3 smd mask+0.051: 1(1.875,1.425) 2(0.625,1.425) 3(-0.625,1.425) 4(-1.875,1.425)
  rect 1x2.8 smd mask+0.051: 5(-3.725,-1.425) 6(3.725,-1.425)
  silkscreen extent -4.06,-2.8 4.06,2.16, body extent -4.07,-2.4 4.19,2.15, height 4.13
CONN-SMD_6P-P1.50_ZX-ZH1.5-6PWT [mm]
  rect 1x2.3 smd paste+0 mask+0.05: 1(-3.75,2) 2(-2.25,2) 3(-0.75,2) 4(0.75,2) 5(2.25,2) 6(3.75,2)
  rect 1x2.5 smd paste+0 mask+0.05: 7(5.75,-2) 8(-5.75,-2)
  silkscreen extent -6.27,-3.97 6.27,3.04, body extent -6,-3.81 6.01,2.69, height 3.7
DSUB-TH_DMR-9S [mil]
  rect 62x62 hole 43.31 paste+0 mask+2: 1(-304.49,217.32)
  round 62 hole 43.31 paste+0 mask+2: 2(-304.49,108.66) 3(-304.49,0) 4(-304.49,-108.66) 5(-304.49,-217.32) 6(-192.68,162.99) 7(-192.68,54.33) 8(-192.68,-54.33) 9(-192.68,-162.99)
  round 196.85 hole 127.95 paste+0 mask+2: 10(-248.59,492.13) 11(-248.59,-492.12)
  silkscreen extent -367,-606 362,606, body extent -355,-608 374,608, height 498
HDR-TH_7P-P2.54-V-F [mm]
  rect 1.575x1.7 hole 1.1: 1(-7.62,0)
  round 1.7 hole 1.1: 2(-5.08,0) 3(-2.54,0) 4(0,0) 5(2.54,0) 6(5.08,0) 7(7.62,0)
  silkscreen extent -9.13,-1.2 9.13,1.2, body extent -13.63,-26.36 13.88,1.69, height 14.46
IND-SMD_L5.4-W5.2 [mm]
  rect 1.9x2.5 smd: 1(2.05,0) 2(-2.05,0)
  silkscreen extent -2.78,-2.68 2.78,2.68, body extent -2.7,-2.6 2.7,2.6, height 3.1
KEY_SMD [mm]
  rect 1.1x0.7 smd: 1(-1.775,-1.1) 1(1.775,-1.1) 2(-1.775,1.1) 2(1.775,1.1)
  silkscreen extent -1.78,-1.78 1.78,1.78, body extent -1.75,-1.35 1.75,1.35, height 1.6
L-SMD-0630 [mm] "一体化成型电感"
  rect 3x3.5 smd: 1(-3.175,0) 2(3.175,0)
  silkscreen extent -3.66,-3.48 3.66,3.48, body extent -3.47,-3.3 3.47,3.3, height 3.05
led0805 [mil] "1/8W"
  rect 50x50 smd: 1(0,0) 2(82.3,0.2)
  silkscreen extent -40,-45 122,45, body extent 2,-25 80,25, height 20
LED-SMD_4P-L5.0-W5.0-BL_XL-5050RGBC [mm]
  rect 1x1.5 smd: 1(16.771,-17.323) 2(19.771,-17.323) 3(19.771,-12.323) 4(16.771,-12.323)
  silkscreen extent 15.77,-18.92 20.77,-10.42, body extent 15.79,-17.56 20.79,-12.16, height 1.54
LQFP-48 [mm]
  oval 2x0.3 smd: 1(23.567,-34.461) 2(23.567,-34.961) 3(23.567,-35.461) 4(23.567,-35.961) 5(23.567,-36.461) 6(23.567,-36.961) 7(23.567,-37.461) 8(23.567,-37.961) 9(23.567,-38.461) 10(23.567,-38.961) 11(23.567,-39.461) 12(23.567,-39.961) 25(32.567,-39.961) 26(32.567,-39.461) 27(32.567,-38.961) 28(32.567,-38.461) 29(32.567,-37.961) 30(32.567,-37.461) 31(32.567,-36.961) 32(32.567,-36.461) 33(32.567,-35.961) 34(32.567,-35.461) 35(32.567,-34.961) 36(32.567,-34.461)
  oval 0.3x2 smd: 13(25.317,-41.711) 14(25.817,-41.711) 15(26.317,-41.711) 16(26.817,-41.711) 17(27.317,-41.711) 18(27.817,-41.711) 19(28.317,-41.711) 20(28.817,-41.711) 21(29.317,-41.711) 22(29.817,-41.711) 23(30.317,-41.711) 24(30.817,-41.711) 37(30.817,-32.711) 38(30.317,-32.711) 39(29.817,-32.711) 40(29.317,-32.711) 41(28.817,-32.711) 42(28.317,-32.711) 43(27.817,-32.711) 44(27.317,-32.711) 45(26.817,-32.711) 46(26.317,-32.711) 47(25.817,-32.711) 48(25.317,-32.711)
  silkscreen extent 22.51,-41.71 32.57,-32.57, body extent 23.56,-41.71 32.57,-32.71, height 1.45
OSC-3225-4P [mm] "3.2*2.5*0.7mm(长宽高)                             淘宝ID:黄晶宝石"
  rect 1.3x1.2 smd: 1(-1.05,-0.85) 2(1.05,-0.85) 3(1.05,0.85) 4(-1.05,0.85)
  silkscreen extent -2.03,-1.75 1.91,1.65, body extent -1.6,-1.25 1.6,1.25, height 0.7
pg-tdson-8 [mm]
  rect 0.61x1.4 smd: 1(3.175,-5.588) 2(-0.635,0.044) 2(0.635,0.044) 2(1.905,0.044) 2(3.175,0.044) 3(-0.635,-5.588) 3(0.635,-5.588) 3(1.905,-5.588)
  rect 4x3.81 smd: 2(1.27,-2.056)
  silkscreen extent -1.55,-6.7 3.9,0.23, body extent -1.43,-5.73 3.96,0.42, height 1.01
"QFN-8 3x3" [mm]
  rect 1.4x0.3 smd: 1(0,0) 2(0,-0.65) 3(0,-1.3) 4(0,-1.95) 5(2.3,-1.95) 6(2.3,-1.3) 7(2.3,-0.65) 8(2.3,0)
  silkscreen extent -0.64,-2.54 2.67,0.64, body extent -0.41,-2.53 2.69,0.57, height 0.94
R0402 [mil] "1/16W"
  rect 25x20 smd: 1(0,0) 2(48.2,0)
  silkscreen extent -22,-20 70,20, body extent 5,-10 44,10, height 14
SOIC-8_L4.9-W3.9-P1.27-LS6.0-BL [mm]
  oval 0.588x2.045 smd mask+0.051: 1(-1.905,-2.772) 2(-0.635,-2.772) 3(0.635,-2.772) 4(1.905,-2.772) 5(1.905,2.772) 6(0.635,2.772) 7(-0.635,2.772) 8(-1.905,2.772)
  silkscreen extent -2.8,-2.92 2.53,1.52, body extent -2.45,-3 2.45,3, height 1.75
SOIC-14_L8.7-W3.9-P1.27-LS6.0-BL [mil]
  oval 22.6x80.24 smd: 1(-150,-109.02) 2(-100,-109.02) 3(-50,-109.02) 4(0,-109.02) 5(50,-109.02) 6(100,-109.02) 7(150,-109.02) 8(150,109.02) 9(100,109.02) 10(50,109.02) 11(0,109.02) 12(-50,109.02) 13(-100,109.02) 14(-150,109.02)
  silkscreen extent -185,-115 173,60, body extent -169,-117 169,119, height 75
SOIC-16_L9.9-W3.9-P1.27-LS6.0-BL [mil]
  oval 23.7x77.6 smd paste+0 mask+2: 1(-169.99,-107.7) 2(-119.99,-107.7) 3(-69.99,-107.7) 4(-19.99,-107.7) 5(30.01,-107.7) 6(80.01,-107.7) 7(130.01,-107.7) 8(180.01,-107.7) 9(180.01,107.7) 10(130.01,107.7) 11(80.01,107.7) 12(30.01,107.7) 13(-19.99,107.7) 14(-69.99,107.7) 15(-119.99,107.7) 16(-169.99,107.7)
  silkscreen extent -206,-111 203,60, body extent -190,-115 200,121, height 75
SOT-23-3_L2.9-W1.3-P1.90-LS2.4-BR [mm]
  rect 1.25x0.7 smd: 1(6.562,-4.885) 2(6.562,-2.985) 3(4.562,-3.935)
  silkscreen extent 4.84,-5.46 6.29,-2.41, body extent 4.19,-5.39 6.99,-2.49, height 1.3
SOT-23-5_L3.0-W1.7-P0.95-LS2.8-BR [mm]
  rect 1.1x0.6 smd: 1(1.3,-0.95) 2(1.3,0) 3(1.3,0.95) 4(-1.3,0.95) 5(-1.3,-0.95)
  silkscreen extent -1.4,-1.78 0.9,1.55, body extent -1.5,-1.5 1.5,1.5, height 1.3
SW-TH_6P-L12.7-W11.4-P4.70-LS4.8 [mm]
  oval 3x1.7 hole 1.2 slot 2.5 at 0 deg: 1(-2.235,-4.318) 2(-2.235,0.255) 3(-2.235,4.827) 4(2.616,-4.318) 5(2.618,0.255) 6(2.618,4.827)
  silkscreen extent -6.05,-6.35 5.96,6.35, body extent -6.15,-6.3 6.56,6.8, height 41.07
USB-C-SMD_TYPE-C-6PIN-2MD-073 [mm]
  rect 0.55x1.1 smd paste-100 mask+0.05: 1(-3.2,2.375) 2(-2.4,2.375) 11(2.4,2.375) 12(3.2,2.375)
  rect 0.3x1.1 smd paste-100 mask+0.05: 3(-1.75,2.375) 4(-1.25,2.375) 5(-0.75,2.375) 6(-0.25,2.375) 7(0.25,2.375) 8(0.75,2.375) 9(1.25,2.375) 10(1.75,2.375)
  oval 1.2x1.8 hole 0.6 slot 1.2 at 90 deg paste+0 mask+0.05: 13(-4.325,-2.375) 14(4.325,-2.375)
  oval 1.1x2 hole 0.6 slot 1.5 at 90 deg paste+0 mask+0.05: 13(-4.325,1.825) 14(4.325,1.825)
  Keep-Out Layer board cut-out: -2.54,1.305 -2.589,1.477 -2.717,1.603 -2.89,1.649 -3.063,1.603 -3.191,1.477 -3.24,1.305 -3.24,1.305 -3.191,1.133 -3.063,1.007 -2.89,0.961 -2.717,1.007 -2.589,1.133 -2.54,1.305
  Keep-Out Layer board cut-out: 3.24,1.305 3.191,1.477 3.063,1.603 2.89,1.649 2.717,1.603 2.589,1.477 2.54,1.305 2.54,1.305 2.589,1.133 2.717,1.007 2.89,0.961 3.063,1.007 3.191,1.133 3.24,1.305
  Keep-Out Layer circle w0.025: c-2.89,1.305 r0.35
  Keep-Out Layer circle w0.254: c-2.89,1.305 r0.35
  Keep-Out Layer circle w0.025: c2.89,1.305 r0.35
  Keep-Out Layer circle w0.254: c2.89,1.305 r0.35
  silkscreen extent -4.5,-4.97 4.57,0.6, body extent -4.47,-4.93 4.47,2.65, height 3.36
VQFN-20_L4.5-W3.5-P0.50-BL-EP [mm]
  rect 0.85x0.28 smd: 1(-2.25,-0.752) 10(2.25,-0.752) 11(2.25,0.748) 20(-2.25,0.75)
  rect 0.28x0.85 smd: 2(-1.749,-1.75) 3(-1.248,-1.75) 4(-0.749,-1.75) 5(-0.248,-1.75) 6(0.251,-1.75) 7(0.752,-1.75) 8(1.251,-1.75) 9(1.752,-1.75) 12(1.752,1.75) 13(1.251,1.75) 14(0.75,1.748) 15(0.25,1.748) 16(-0.25,1.748) 17(-0.75,1.748) 18(-1.25,1.748) 19(-1.75,1.748)
  rect 2.7x1.7 smd: 21(0,-0.002)
  silkscreen extent -3.05,-1.78 2.29,1.78, body extent -2.26,-1.76 2.26,1.76, height 1
XT30PW-M [mm]
  round 1.8 hole 1: 0(-5.5,-5) 0(5.5,-5)
  round 2.8 hole 1.8: +(2.5,5) -(-2.5,5)
  silkscreen extent -6.73,-8.05 6.73,1, body extent -6.65,-8 6.65,5.95, height 5.29

## Part data
C1 C2 C3 C4 C5 C6 C7 C8 C9 C10 C11 C15 C17 C24 C25 C30 C32 C33 C34 C35 C41 C42 C43 C44 C50 C51 C52 C53 C60 C62 C64 C68 C69: library part 0402贴片电容, "贴片电容0402"
C12 C13 C14 C16 C20 C21 C23 C36 C37 C38 C39 C45 C46 C47 C54 C55 C56 C63 C65: library part 1210贴片电容, "1210贴片电容"
C18 C19: library part 3216钽电容, "3216钽电容"
C22 C26 C27 C28 C29 C49 C59: library part 0603贴片电容, "0603贴片电容"
D1 D2 D3 D4: "N沟道MOS管", ComponentLink1Description="Manufacturer Link", ComponentLink1URL=http://www.irf.com/, DatasheetVersion=PD-9.814, LatestRevisionDate=17-Jul-2002, LatestRevisionNote="Re-released for DXP Platform.", Note="Pin 2 is electrically connected to pin 4.", PackageDescription="TO, Thru-Hole, Vertical, Heatsink Mounted; 3 In-Line Leads; Pitch 2.54 mm", PackageReference=TO-220AB, PackageVersion=Feb-1997, Published=8-Jun-2000, Publisher="Altium Limited"
H1: Current Rating (Max)=3A, JLCPCB Part Class="Extended Part", LCSC Part Name="间距:2.54mm 1x7P 直插", Manufacturer=XFCN(兴飞), Operating Temperature Range=-40℃~+105℃, Voltage Rating (Max)=250V, Add into BOM=yes, Circular Hole / Square Hole=方孔, Convert to PCB=yes, Datasheet=https://atta.szlcsc.com/upload/public/pdf/source/20210514/C2832270_F424CC0071A81298BFB56B53406F9842.pdf, Device=PM254V-11-07-H85, Holes Direction=顶部, Holes Structure=1x7P, Insulation Height=-, Manufacturer Part=PM254V-11-07-H85, Mounting Type=直插, Number of Holes=7P, Number of Rows=单排, Pitch=2.54mm, Row Spacing=-, Supplier=LCSC, Supplier Footprint=插件,P=2.54mm, Supplier Part=C2832270, Symbol=PM254V-11-07-H85
L1 L2: library part 0630功率电感, "一体成型屏蔽电感"
L3: library part 0530屏蔽电感, "一体成型屏蔽电感，0530封装，额定电流3A", DC Resistance (DCR)=125mΩ, JLCPCB Part Class="Extended Part", LCSC Part Name="10uH ±20% 3.5A", Manufacturer=XR(祥如), Manufacturer Part=XR0530-100M, Rated Current=3.2A, Saturation Current (Isat)=3.5A, Tolerance=±20%, Add into BOM=yes, Convert to PCB=yes, Datasheet=https://atta.szlcsc.com/upload/public/pdf/source/20240328/42FE63A3232C4AF7EB8F1CDEDD5FC69F.pdf, Device=XR0530-100M, Supplier=LCSC, Supplier Footprint=SMD,0530, Supplier Part=C5307602, Symbol=XR0530-100M, Type=一体成型电感
LED1 LED2 LED3 LED4 LED5 LED6 LED7 LED8 LED9 LED10: library part WS2812B彩灯珠, "WS2812B彩灯珠", Color Temperature=-, Emitted Color=RGB三色, JLCPCB Part Class="Extended Part", Lens Color=无色透明透镜, Manufacturer=XINGLIGHT(成兴光), Operating Temperature=-20℃~+85℃, Add into BOM=yes, Convert to PCB=yes, Datasheet=https://atta.szlcsc.com/upload/public/pdf/source/20230111/86AAD2096485A2E5BCAB883FF8CBE6FD.pdf, Device=XL-5050RGBC-WS2812B, Diode Configuration=-, Dominant Wavelength=-, Forward Current=-, LCSC Part Name=XL-5050RGBC-WS2812B, Manufacturer Part=XL-5050RGBC-WS2812B, Mounting Sytle=正贴, Peak Wavelength=625nm；470nm；530nm, Power Dissipation=-, Supplier=LCSC, Supplier Footprint=SMD5050, Supplier Part=C2843785, Symbol=XL-5050RGBC-WS2812B, Viewing Angle=120°
LED11 LED12 LED13 LED14: library part 0805贴片LED, "0805贴片LED"
P1: library part 卧式XT30母头, "卧式XT30母头", LatestRevisionDate=17-Jul-2002, LatestRevisionNote="Re-released for DXP Platform.", Publisher="Altium Limited"
Q1: library part 2N2222, "三极管"
R1 R2 R3 R4 R5 R6 R7 R8 R9 R10 R11 R12 R13 R14 R15 R16 R17 R18 R19 R20 R21 R22 R23 R24 R25 R26 R27 R28 R29 R30 R31 R32 R33 R34 R35 R36 R37 R38 R39 R40 R41 R42 R43 R44 R45 R46 R47 R48 R49 R50 R51 R52 R53 R54 R55 R56 R57: library part 0402贴片电阻, "0402贴片电阻"
S1 S2: "开关"
U1 U3 U6: Color=米色, Flame Retardant Rating=-, JLCPCB Part Class="Extended Part", LCSC Part Name="1x6P 间距:1.5mm 卧贴 系列:ZH", Manufacturer=Megastar(兆星), Operating Temperature=-25℃~+85℃, Rated Current=1A, Rated Voltage (Max)=250V, Add into BOM=yes, Contact Material=黄铜, Contact Plating=锡, Convert to PCB=yes, Datasheet=https://atta.szlcsc.com/upload/public/pdf/source/20231201/C5A824B953C40A6060EBF5A541254C86.pdf, Device=ZX-ZH1.5-6PWT, Manufacturer Part=ZX-ZH1.5-6PWT, Mounting Type=卧贴, Number of Pins=6P, Number of PINs Per Row=6, Number of Rows=1, Pins Structure=1x6P, Pitch=1.5mm, Plastic Material=LCP, Reference Series=ZH, Row Spacing=-, Supplementary Features=辅助焊脚, Supplier=LCSC, Supplier Footprint=SMD,P=1.5mm,卧贴, Supplier Part=C19272409, Symbol=ZX-ZH1.5-6PWT, X-Length of Bottom Edge on Board (Spacing Line)=12mm, Y-Width of Bottom Edge on Board=6.5mm, Z-Height of the Board=3.8mm
U2 U5 U8: "CAN芯片", JLCPCB Part Class="Extended Part", LCSC Part Name=4.5V~5.5V, Manufacturer=TI(德州仪器), Operating Temperature=-40℃~+125℃, Supply Current=50mA, Add into BOM=yes, Convert to PCB=yes, Datasheet=https://www.ti.com/cn/lit/gpn/sn65hvd1050, Device=SN65HVD1050DR, Manufacturer Part=SN65HVD1050DR, Name=SN65HVD1050DR, Supplier=LCSC, Supplier Footprint=SOIC-8, Supplier Part=C14019, Supply Voltage=4.5V~5.5V, Symbol=SN65HVD1050DR, Type=收发器
U4: JLCPCB Part Class="Extended Part", LCSC Part Name=STM32G473CBT6, Manufacturer=ST(意法半导体), Add into BOM=yes, Convert to PCB=yes, Datasheet=https://atta.szlcsc.com/upload/public/pdf/source/20200902/C730111_19331807E2800E1C1C13BFFAAC550E20.pdf, Device=STM32G473CBT6, Manufacturer Part=STM32G473CBT6, Supplier=LCSC, Supplier Footprint=LQFP-48(7x7), Supplier Part=C730111, Symbol=STM32G473CBT6
U7 U13: Input Voltage=6V~42V, JLCPCB Part Class="Extended Part", LCSC Part Name=LM251456V至42V同步降压直流/直流控制器, Manufacturer=TI(德州仪器), Operating Temperature=-40℃~+125℃, Output Current=20A, Output Voltage=800mV~40V, Quiescent Current (Iq)=-, Switching Frequency=100kHz~1MHz, Add into BOM=yes, Convert to PCB=yes, Datasheet=https://www.ti.com/cn/lit/gpn/lm25145, Device=LM25145RGYR, Function=降压型, Manufacturer Part=LM25145RGYR, Number of Outputs=1, Output Type=可调, Supplier=LCSC, Supplier Footprint=VQFN-20-EP(3.5x4.5), Supplier Part=C2876740, Switch tube (built-in/external)=外置, Symbol=LM25145RGYR, Synchronous Rectification=是, Topology=降压式
U9 U10 U11 U12: JLCPCB Part Class="Extended Part", LCSC Part Name="7208P1YZQI 五件套", Manufacturer=C&K, Operating Temperature=-30℃~+85℃, Voltage Rating (AC)=120V, Voltage Rating (DC)=28V, Actuator Type=圆柱钮柄, Add into BOM=yes, Circuit=双刀双掷, Convert to PCB=yes, Datasheet=https://atta.szlcsc.com/upload/public/pdf/source/20211221/AC201C7675510E1A13CA92FD8B8259B6.pdf, Device=7208P1YZQI, Manufacturer Part=7208P1YZQI, Mounting Style=直插, Pin Style=焊片, Supplier=LCSC, Supplier Footprint=插件, Supplier Part=C2824481, Symbol=7208P1YZQI
U14: "3.3V LDO", JLCPCB Part Class="Extended Part", Manufacturer="HXY MOSFET(华轩阳电子)", MAX Output Current=300mA, Maximum Input Voltage=12V, Output Voltage=3.3V, Add into BOM=yes, Convert to PCB=yes, Datasheet=https://atta.szlcsc.com/upload/public/pdf/source/20231208/3D7EFECB06481ED5AED4680614D7FFF5.pdf, Device=XC6201P332MR-HXY, LCSC Part Name=XC6201P332MR-HXY, Manufacturer Part=XC6201P332MR-HXY, Output Polarity=正极, Output Type=固定, Supplier=LCSC, Supplier Footprint=SOT-23-5L, Supplier Part=C19626990, Symbol=XC6201P332MR-HXY
U17: JLCPCB Part Class="Extended Part", LCSC Part Name=1-/2-/4-通道数字电位器, Manufacturer=ADI(亚德诺), Operating Temperature=-40℃~+125℃, Resistance Value (Ohms)=10kΩ, Supply Voltage=2.7V~5.5V, Temperature Coefficient (Typ)=500ppm/℃, Add into BOM=yes, Convert to PCB=yes, Datasheet=https://atta.szlcsc.com/upload/public/pdf/source/20211026/F04B6EDA79C62679C80111A8307D6AD8.pdf, Device=AD8402ARZ10-REEL, Interface Type=SPI, Manufacturer Part=AD8402ARZ10-REEL, Number of Channels=2, Number of Taps=256, Precision=±20%, Supplier=LCSC, Supplier Footprint=SOIC-14, Supplier Part=C578716, Symbol=AD8402ARZ10-REEL
USB1: Core Colour=黑色, Current Rating - Power (Max)=5A, JLCPCB Part Class="Extended Part", LCSC Part Name="Type-C 母 卧贴", Manufacturer="SHOU HAN(首韩)", Operating Temperature Range=-25℃~+85℃, Rated Voltage (Max)=5V, Add into BOM=yes, Connect-Disconnect Life=5千次, Connector Type=Type-C, Convert to PCB=yes, Datasheet=https://atta.szlcsc.com/upload/public/pdf/source/20211123/39B17C16241EAC15C5E277BDA434118E.pdf, Device="TYPE-C 16PIN 2MD(073)", Gender=母, Manufacturer Part="TYPE-C 16PIN 2MD(073)", Mounting Style=卧贴, Number of Contacts=16P, Number of Ports=1, Standard="USB 3.1", Supplier=LCSC, Supplier Footprint=SMD, Supplier Part=C2765186, Symbol="TYPE-C 16PIN 2MD(073)"

## Free pads (board coordinates)
  round 236.22 hole 122.05: 2(2144.33,2038.39) 2(2144.33,3888.78) 2(5451.42,2038.39) 2(5451.42,3888.78)

## Via types
v1: diameter 24, hole 15, Top Layer to Bottom Layer, 606 vias
v2: diameter 18, hole 12, Top Layer to Bottom Layer, 33 vias
v3: diameter 30, hole 18, Top Layer to Bottom Layer, 1 vias

## Nets (pads, with @x,y where several pads share a name; then routed paths per layer and width w, separated by ;. In a path a pad name is that pad's centre, name@x,y a point inside that pad or via, vN(x,y) a via of type N, cw(c..) or ccw(c..) an arc to the next point about the centre after c; other vN are vias at no path point)
3V3: C5.2 C6.2 C10.2 C11.1 C19.1 CN2.1 Q1.3 R4.2 R15.2 R16.2 R17.2 R18.2 R19.2 R41.2 R43.2 R47.1 R51.1 U4.1 U4.20 U4.21 U4.24 U4.36 U4.48 U14.5 | length 7181.8
  Top Layer w10: R51.1@3128,3354 3133,3346.5 3220,3259.3 C6.2@3225,3251.8 cw(c3232.73,3251.8) 3227.26,3257.26 3255,3285 cw(c3265.74,3274.26) 3265.74,3289.45 U4.48@3299.61,3289.45 3354.26,3289.45 cw(c3354.26,3274.26) 3365,3285 cw(c3356.54,3276.54) 3368.5,3276.54 U4.1@3368.5,3220.55 ; C11.1@3315,3560 3325.25,3570.25 ccw(c3289.64,3605.86) 3340,3605.86 cw(c3362.07,3605.86) 3346.46,3621.46 cw(c3355,3612.93) 3355,3625 cw(c3355,3612.93) 3363.54,3621.46 3365,3620 cw(c3356.54,3611.54) 3368.5,3611.54 U4.36@3368.5,3574.88 ; U4.20@3653.94,3427.24 3681.28,3427.24 ccw(c3681.28,3453.72) 3700,3435 C10.2@3723.88,3458.88 ; U4.21@3653.94,3446.93 3685.37,3446.93 ccw(c3685.37,3514.95) C10.2@3723.88,3458.88 ; U4.24@3653.94,3505.98 3690.3,3505.98 ccw(c3690.3,3519.7) 3700,3510 ccw(c3687.93,3522.07) 3705,3522.07 cw(c3734.01,3522.07) 3713.5,3542.58 C5.2@3733.46,3562.55 ; C10.2@3733.46,3466.85 ccw(c3733.46,3462.95) 3730.71,3465.71 C10.2@3723.88,3458.88
  Top Layer w15: R41.2@2255,3685 2181.42,3685 ccw(c2181.42,3585) 2110.71,3655.71 ccw(c2148.64,3617.78) 2095,3617.78 2095,3510.98 ccw(c2117.29,3510.98) 2101.53,3495.22 ccw(c2123.36,3517.05) 2123.36,3486.18 CN2.1@2171.1,3486.18 2509.73,3486.18 cw(c2509.73,3471.18) 2510.36,3486.17 cw(c2507.55,3424.23) 2569.56,3424.2 2569.56,3424.15 R19.2@2569.56,3318.39 ; R4.2@2569.56,3160.59 2569.78,3160.81 2569.78,3204.78 v1(2570,3205) ; R15.2@3190,3065 v1(3215,3065) R16.2@3240,3065 ; v1(3225,3205) C6.2@3225,3251.8 ; v1(3280,3560) C11.1@3315,3560 ; R17.2@3665,3065 v1(3690,3065) R18.2@3715,3065 ; C10.2@3733.46,3466.85 3755.32,3488.71 ccw(c3744.03,3500) 3760,3500 v1(3760,3539.44) 3760,3547.93 ccw(c3742.93,3547.93) 3755,3560 ccw(c3748.84,3553.84) 3748.84,3562.55 C5.2@3733.46,3562.55
  Sign w15: v1(2570,3205) v1(3225,3205) 3268.58,3205 ccw(c3268.58,3305) 3339.29,3234.29 3431.06,3326.06 cw(c3484,3273.16) 3484,3348 3501.45,3348 cw(c3501.45,3324.45) 3525,3324.45 3525,3312 ; v1(3280,3560) cw(c3320,3560) 3320,3600 3699.44,3600 cw(c3699.44,3539.44) v1(3760,3539.44) 3760,3348 cw(c3724,3348) 3724,3312 3690,3312 ; v1(3690,3065) 3690,3312 ; v3(3825,2335) 3615,2335 cw(c3615,2425) 3525,2425 3525,3312 ; 3525,3312 3690,3312
  Bottom Layer w10: v3(3825,2335) 4108.58,2335 ccw(c4108.58,2435) 4179.29,2364.29 4540.71,2725.71 cw(c4611.42,2655) 4611.42,2755 R43.2@4725,2755
  Bottom Layer w15: v1(2570,3205) 2570,3385 v1(2570.22,3385.22) ; v1(3215,3065) 3240,3065 ccw(c3240,3125) 3300,3125 ccw(c3260,3125) 3260,3165 cw(c3260,3200) 3225,3200 v1(3225,3205) 3225,3258 cw(c3251,3258) 3251,3284 3280.8,3284 cw(c3280.8,3283.26) Q1.3@3281.54,3283.26 ; v1@3759.27,3541.19 cw(c3757.52,3539.44) v1(3760,3539.44)
2812LED: LED1.4 U4.25 | length 2066.6
  Top Layer w10: LED1.4@2640.83,2442.09 ccw(c2645.86,2447.12) LED1.4@2645.86,2440 ; v1(3540.89,3699.11) 3555.75,3684.25 cw(c3485.04,3613.54) 3585.04,3613.54 U4.25@3585.04,3574.88
  Top Layer w15: v1(2511.42,2967) 2511.42,2731.71 2511.42,2615.86 ccw(c2611.42,2615.86) 2540.71,2545.15 2605.43,2480.43 2642.3,2443.56 LED1.4@2645.86,2440
  Bottom Layer w15: v1(2511.42,2967) 2511.42,2986.71 cw(c2563.71,2986.71) 2519.28,3014.28 cw(c2563.71,2986.71) 2536.14,3031.14 cw(c2563.71,2986.71) 2563.71,3039 2803.58,3039 ccw(c2803.58,3139) 2874.29,3068.29 3391.78,3585.78 cw(c3422.26,3555.36) 3422.26,3598.42 ccw(c3422.26,3641.71) 3452.93,3611.16 v1(3540.89,3699.11)
*CS1: H1.7 U4.18 | length 599
  Top Layer w10: U4.18@3653.94,3387.87 3845.7,3387.87 cw(c3845.7,3287.87) 3916.42,3358.58 4095,3180 cw(c4051.94,3136.94) 4112.83,3136.94 4112.83,3125.79 H1.7@4095.63,3125.79
*CS2: U4.41 U17.7 | length 3797.2
  Top Layer w10: v1(3215,3450) ccw(c3237.76,3450) 3237.76,3427.24 U4.41@3299.61,3427.24
  Bottom Layer w10: v1(3215,3450) 3215,3810 cw(c3315,3810) 3315,3910 5015,3910 cw(c5015,3810) 5115,3810 5115,2802.07 cw(c5090.3,2802.07) 5090.3,2777.37 5079.52,2777.37 5014.05,2777.37 cw(c5014.05,2877.37) 4943.34,2806.66 4915,2835 ccw(c4874.75,2794.75) 4874.75,2851.67 U17.7@4835.64,2851.67
*RS2: R51.2 U4.42 U17.10 | length 3805.8
  Top Layer w10: R51.2@3128,3402.2 3129.27,3409.7 cw(c3150.8,3402.2) 3150.8,3425 v1(3190,3425) ccw(c3207.44,3425) 3207.44,3407.56 U4.42@3299.61,3407.56
  Bottom Layer w10: v1(3190,3425) 3190,3830 cw(c3290,3830) 3290,3930 5035,3930 cw(c5035,3830) 5135,3830 5135,3738.7 cw(c5125,3738.75) 5134.11,3734.62 ccw(c5155,3725) 5134.1,3715.39 cw(c5125,3711.25) 5135,3711.3 5135,2784.14 cw(c5100.86,2784.14) 5125,2760 cw(c5104.89,2780.11) 5104.89,2751.67 ; U17.10@5053.68,2751.67 5104.85,2751.67
+5: C1.1 C2.1 C7.1 C14.2 C18.1 C20.2 C21.2 C22.2 C26.2 C65.2 C69.2 CN1.1 H1.2 L3.2 LED1.1 LED2.1 LED3.1 LED4.1 LED5.1 LED6.1 LED7.1 LED8.1 LED9.1 LED10.1 R37.2 U2.3 U5.3 U8.3 U14.1 U14.3 U15.16 U17.11 | length 8728.6
  Top Layer w15: C21.2@2104.96,2277.4 C20.2@2301.81,2277.4 C14.2@2498.66,2277.4 2618.5,2277.4 2640.83,2255.08 LED1.1@2640.83,2245.24 2640.83,2235.39 2653.01,2223.21 2662.85,2223.21 2717.22,2168.84 2746.75,2168.84 LED6.1@2758.94,2156.65 ; CN1.1@2172.2,3144.53 2172.55,3144.18 v1(2275.73,3144.18) v1@2274.01,3142.46 ; C26.2@2650,3306.5 2689.48,3306.5 ccw(c2689.48,3335.52) 2710,3315 ccw(c2685.82,3339.18) 2720.01,3339.18 U15.16@2720.01,3377.7 2720.01,3430.13 ccw(c2663.63,3430.13) C22.2@2703.5,3470 v1(2660,3470) ; LED6.1@2758.94,2146.81 LED6.1@2758.94,2156.65 ; LED2.1@2857.37,2245.24 LED2.1@2857.37,2235.39 ; LED7.1@2975.47,2146.81 LED7.1@2975.47,2156.65 ; LED3.1@3073.9,2245.24 LED3.1@3073.9,2235.39 ; LED8.1@3192,2146.81 LED8.1@3192,2156.65 ; LED4.1@3290.43,2245.24 LED4.1@3290.43,2235.39 ; LED9.1@3408.54,2146.81 LED9.1@3408.54,2156.65 ; LED5.1@3506.98,2245.24 LED5.1@3506.98,2235.39 ; LED10.1@3625.08,2156.65 3612.89,2168.84 3583.38,2168.84 3529.01,2223.21 3519.16,2223.21 LED5.1@3506.98,2235.39 ; C65.2@3895,1975 3770,1975 C18.1@3755,1990 3737.5,2007.5 3737.5,2024.55 3625.08,2136.97 LED10.1@3625.08,2146.81 3633.27,2155 3757.21,2155 ccw(c3757.21,2255) 3827.92,2184.29 3857.6,2213.97 U14.1@3857.6,2223.82 3857.6,2234.6 cw(c3893,2234.6) 3893,2270 3932.4,2270 ; U14.3@3932.4,2223.82 3932.4,2270 ; H1.2@4112.83,2625.79 4074.29,2587.24 ccw(c4145,2516.53) 4045,2516.53 4045,2433.31 cw(c3982.86,2433.31) R37.2@4026.8,2389.37 4026.8,2389 4005,2389 ccw(c4005,2353) 3969,2353 3969,2295 cw(c3944,2295) 3968.01,2288.03 ccw(c3991,2277) 3966.52,2284.15 cw(c3944,2295) 3944,2270 3932.4,2270 ; LED6.1@2758.94,2156.65 2825.49,2223.21 2845.19,2223.21 LED2.1@2857.37,2235.39 ; LED2.1@2857.37,2235.39 2869.56,2223.21 2908.92,2223.21 LED7.1@2975.47,2156.65 ; LED7.1@2975.47,2156.65 3042.03,2223.21 3061.71,2223.21 LED3.1@3073.9,2235.39 ; LED3.1@3073.9,2235.39 3086.08,2223.21 3095.93,2223.21 3150.3,2168.84 3179.81,2168.84 LED8.1@3192,2156.65 ; LED8.1@3192,2156.65 3258.55,2223.21 3278.25,2223.21 LED4.1@3290.43,2235.39 ; LED4.1@3290.43,2235.39 3302.62,2223.21 3312.46,2223.21 3366.83,2168.84 3396.36,2168.84 LED9.1@3408.54,2156.65 ; LED9.1@3408.54,2156.65 3475.1,2223.21 3494.79,2223.21 LED5.1@3506.98,2235.39
  Sign w15: v1(2560,2310) 2560,2818.49 ccw(c2460,2818.49) 2530.71,2889.2 v1(2275.73,3144.18) 2264.29,3155.62 cw(c2335,3226.33) 2235,3226.33 2235,3400 cw(c2305,3400) 2305,3470 v1(2660,3470) ; 3798.04,3461.91 ccw(c3817.54,3442.46) 3790,3442.46 v1(3790,3415) 4005.71,3199.29 cw(c3935,3128.58) 4035,3128.58 4035,2745.04 ccw(c4135,2745.04) 4064.29,2674.33 H1.2@4112.83,2625.79 ; 3798.09,3461.96 cw(c3817.54,3442.46) 3817.54,3470 v1(3935,3470) ; v1@4900,3281 v1(4895,3281) cw(c4895,3205) 4971,3205 4971,2712.57 cw(c4959.39,2712.57) v1(4959.39,2700.97)
  Bottom Layer w10: U17.11@5053.68,2701.67 5105.75,2701.67 ccw(c5105.75,2764.25) C69.2@5150,2720
  Bottom Layer w15: C7.1@3655,3322.68 C7.1@3655,3325 U8.3@3655,3406.7 3655,3440.29 3655,3440.35 cw(c3678.48,3440.35) 3661.88,3456.95 cw(c3681.31,3437.51) 3681.31,3465 3755.86,3465 cw(c3755.86,3430.86) 3780,3455 cw(c3755.86,3430.86) 3790,3430.86 v1(3790,3415) v1@3788.28,3416.72 ; v1(3935,3470) 4276.36,3470 ; C2.1@4275,3325 U5.3@4275,3405.85 4276.36,3407.21 4276.36,3470 ; v1(4895,3281) C1.1@4895,3325 4894.88,3325.12 4894.88,3405.18 U2.3@4894.76,3405.3 4894.76,3405.42 4894.88,3405.42 4894.88,3453.21 ccw(c4878.21,3453.21) 4890,3465 ccw(c4877.93,3452.93) 4877.93,3470 4276.36,3470 ; v1(4959.39,2700.97) 4959.75,2701.32 5053.33,2701.32 U17.11@5053.68,2701.67
ADC1_CH1: R54.1 R56.2 U4.9 | length 2565.3
  Top Layer w10: v1(3430,3435) ccw(c3466.21,3435) 3440.61,3409.39 3496.7,3353.3 cw(c3425.98,3282.59) 3520.89,3314.11 cw(c3425.98,3282.59) 3525.98,3282.59 U4.9@3525.98,3220.55 ; v1(3545,3805) 3545,3776.42 ccw(c3645,3776.42) 3574.26,3705.74 ; 3574.29,3705.71 3600.71,3679.29 cw(c3530,3608.58) 3630,3608.58 v1(3630,3545)
  Sign w10: v1(3430,3435) 3457.32,3462.32 cw(c3500,3419.64) 3500,3480 3585.86,3480 ccw(c3585.86,3514.14) 3610,3490 ccw(c3561.72,3538.28) 3630,3538.28 v1(3630,3545) ; v1(3545,3805) 3545,3820.37 cw(c3614.63,3820.37) 3614.63,3890 3660,3890 4989.1,3890 cw(c4989.1,3790) 5089.1,3790 v1(5089.1,3675)
ADC1_CH2: R55.1 R57.2 U4.10 | length 1828.5
  Top Layer w10: v1(3460,3425) 3516.38,3368.62 cw(c3445.67,3297.91) 3537.5,3337.5 cw(c3445.67,3297.91) 3545.67,3297.91 U4.10@3545.67,3220.55 ; v1(3592.78,3759.07) ccw(c3657.61,3759.07) 3611.77,3713.23 3645.71,3679.29 cw(c3575,3608.58) 3675,3608.58 v1(3675,3545)
  Sign w10: v1(3460,3425) cw(c3520.36,3364.64) v1(3460,3425) cw(c3520.36,3364.64) 3520.36,3450 3582.93,3450 ccw(c3582.93,3532.07) 3640.93,3474 ; v1@3590.1,3761.75 v1(3592.78,3759.07) 3592.78,3797.78 cw(c3640,3797.78) 3640,3845 3705,3845 4370,3845 cw(c4370,3745) 4470,3745 v1(4470,3675) ; 3640.96,3474.04 3663.5,3496.57 ccw(c3633.53,3526.54) 3675.91,3526.54 3675.91,3544.09 v1(3675,3545)
ADC1_VCC: R34.1 R35.2 U4.8 | length 1135.5
  Top Layer w10: U4.8@3506.3,3220.55 3506.3,3190.02 ccw(c3545.68,3190.02) 3517.83,3162.18 3542.95,3137.06 ccw(c3560,3154.11) v1(3560,3130)
  Top Layer w15: R35.2@3856.22,2449.68 v1(3884.62,2449.68) R34.1@3913.02,2449.68
  Sign w15: v1(3560,3130) 3560,2546.94 ccw(c3655.99,2546.94) 3588.11,2479.06 ; 3588.15,2479.03 ccw(c3659.04,2549.99) 3659.04,2449.68 v1(3884.62,2449.68)
B2_1: R48.2 R49.1 U17.14 | length 176.1
  Top Layer w15: R49.1@5156.2,2560 v1(5180,2560) R48.2@5203.8,2560
  Bottom Layer w15: U17.14@5053.68,2551.67 5159.89,2551.67 ccw(c5159.89,2580.11) v1(5180,2560)
B2_2: R27.1 R50.2 U17.2 | length 344.8
  Top Layer w15: R27.1@4547,2560 v1(4570.5,2560) R50.2@4594,2560
  Bottom Layer w15: v1(4570.5,2560) 4583.23,2547.27 ccw(c4634.58,2598.63) 4634.58,2526 4650.64,2526 ccw(c4650.64,2611.36) 4710.96,2550.96 ccw(c4650.64,2611.36) 4711,2551 4720.77,2560.77 ; 4720.79,2560.79 cw(c4757.55,2523.99) 4757.55,2576 4760.94,2576 ccw(c4760.94,2619.82) 4791.9,2588.81 ; 4791.96,2588.86 cw(c4822.92,2557.85) 4822.92,2601.67 U17.2@4835.64,2601.67
DC: H1.6 U4.17 | length 653.1
  Top Layer w10: U4.17@3653.94,3368.19 3840.39,3368.19 cw(c3840.39,3268.19) 3911.1,3338.9 4035.71,3214.29 cw(c3965,3143.58) 4065,3143.58 4065,3115.04 ccw(c4165,3115.04) 4094.29,3044.33 H1.6@4112.83,3025.79
FDCAN1_N: R2.1 U1.6 U2.6 | length 187.5
  Top Layer w15: U1.6@4890.4,3795.51 cw(c4860.98,3766.09) 4902.58,3766.09 4902.58,3736.83 ccw(c4908.24,3736.83) v1@4904.24,3732.83 ; v1@4904.24,3732.82 cw(c4900.24,3728.82) 4905.9,3728.82 v1(4905.9,3728.73)
  Bottom Layer w15: U2.6@4894.76,3623.6 4894.76,3643 cw(c4918.04,3643) 4901.58,3659.46 ccw(c4885.12,3675.92) 4908.4,3675.92 4908.4,3684.47 ccw(c4892.87,3684.47) 4903.85,3695.45 4901.07,3698.23 ccw(c4896.8,3693.96) R2.1@4896.8,3700 ccw(c4874.83,3721.97) 4905.9,3721.97 v1(4905.9,3728.73)
FDCAN1_P: R2.2 U1.5 U2.7 | length 186.3
  Top Layer w15: v1(4935.9,3728.73) ccw(c4931.74,3732.89) 4937.62,3732.89 4937.62,3766.96 cw(c4978,3766.96) U1.5@4949.45,3795.51
  Bottom Layer w15: v1(4935.9,3728.73) 4935.9,3721.97 ccw(c4966.97,3721.97) R2.2@4945,3700 ccw(c4945,3693.96) 4940.73,3698.23 4937.95,3695.45 ccw(c4948.93,3684.47) 4933.4,3684.47 4933.4,3673.18 ccw(c4952.8,3673.18) 4939.08,3659.46 cw(c4925.36,3645.74) 4944.76,3645.74 U2.7@4944.76,3623.6
FDCAN1_RX: R1.2 U2.4 U4.45 | length 1795.2
  Top Layer w10: R1.2@3223.2,3350 ccw(c3226.81,3353.61) 3226.81,3348.5 3387.77,3348.5 3391.47,3344.8 v1(3395.26,3344.8)
  Bottom Layer w10: v1(3395.26,3344.8) 3459.35,3280.71 ccw(c3521.42,3342.78) 3521.42,3255 4816.82,3255 ccw(c4816.82,3282.95) 4844.76,3282.71 U2.4@4844.76,3405.3
FDCAN1_TX: U2.1 U4.46 | length 1884.8
  Top Layer w10: U4.46@3299.61,3328.82 3357.81,3328.82 3364.43,3322.21 v1(3368.22,3322.21)
  Bottom Layer w10: v1(3368.22,3322.21) 3427.55,3262.87 ccw(c3498.26,3333.58) 3498.26,3233.58 4954.63,3233.58 ccw(c4954.63,3273.72) 4994.76,3273.72 U2.1@4994.76,3405.3
FDCAN2_N: R3.1 U3.6 U5.6 | length 179.1
  Top Layer w15: U3.6@4270.31,3795.51 cw(c4241.18,3766.38) 4282.38,3766.38 4282.38,3734.16 ccw(c4288.26,3734.16) v1(4284.1,3730)
  Bottom Layer w15: U5.6@4275,3624.15 4275,3645.89 cw(c4294.8,3645.89) 4280.8,3659.89 ccw(c4266.8,3673.9) 4286.6,3673.9 4286.6,3684.47 ccw(c4271.07,3684.47) R3.1@4282.05,3695.45 ; R3.1@4275,3700 ccw(c4275,3706.04) 4279.27,3701.77 ccw(c4271.76,3709.28) 4282.38,3709.28 4282.38,3725.84 cw(c4288.26,3725.84) v1(4284.1,3730)
FDCAN2_P: R3.2 U3.5 U5.7 | length 180
  Top Layer w15: v1(4314.1,3730) 4314.1,3730.26 cw(c4319.35,3730.26) 4315.64,3733.97 ccw(c4311.92,3737.69) 4317.18,3737.69 4317.18,3766.09 cw(c4358.78,3766.09) U3.5@4329.36,3795.51
  Bottom Layer w15: v1(4314.1,3730) cw(c4309.94,3725.84) 4315.82,3725.84 4315.82,3709.28 ccw(c4326.44,3709.28) 4318.93,3701.77 ccw(c4323.2,3706.04) R3.2@4323.2,3700 ; R3.2@4316.15,3695.45 ccw(c4327.13,3684.47) 4311.6,3684.47 4311.6,3676.07 ccw(c4334.48,3676.07) 4318.3,3659.89 cw(c4302.12,3643.72) 4325,3643.72 U5.7@4325,3624.15
FDCAN2_RX: U4.26 U5.4 | length 895.7
  Top Layer w10: U4.26@3565.53,3574.87 3565.7,3574.7 3565.7,3533.09 3580,3518.79 v1(3580,3515)
  Bottom Layer w10: v1(3580,3515) 3678.18,3513.47 ccw(c3678.54,3536.46) 3678.95,3513.47 3763.38,3515 cw(c3763.56,3505) 3763.63,3515 cw(c3763.58,3402.93) 3842.82,3482.17 4004.25,3320.75 ccw(c4066.42,3382.93) 4066.42,3295 4205,3295 ccw(c4205,3315) 4225,3315 U5.4@4225,3405.85
FDCAN2_TX: U4.27 U5.1 | length 1097.6
  Top Layer w10: v1(3545,3520) 3545.33,3520.33 3545.33,3574.55 U4.27@3545.67,3574.88
  Bottom Layer w10: v1(3545,3520) 3545,3519.14 ccw(c3579.14,3519.14) 3555,3495 ccw(c3579.14,3519.14) 3579.14,3485 3768.58,3485 cw(c3768.58,3385) 3839.29,3455.71 3990.71,3304.29 ccw(c4061.42,3375) 4061.42,3275 4334.95,3275 ; 4335,3275 ccw(c4335,3315) 4375,3315 U5.1@4375,3405.85
FDCAN3_N: R5.1 U6.6 U8.6 | length 209.1
  Top Layer w15: U6.6@3662.42,3766.09 ccw(c3620.82,3766.09) U6.6@3650.23,3795.51 cw(c3620.92,3766.19) 3662.38,3766.19 3662.38,3734.16 ccw(c3668.26,3734.16) v1(3664.1,3730)
  Bottom Layer w15: U8.6@3655,3625 3655,3646.74 cw(c3674.8,3646.74) 3660.8,3660.74 ccw(c3646.8,3674.75) 3666.6,3674.75 3666.6,3684.47 ccw(c3651.07,3684.47) R5.1@3662.05,3695.45 ; R5.1@3655,3700 ccw(c3633.03,3721.97) 3664.1,3721.97 v1(3664.1,3730)
FDCAN3_P: R5.2 U6.5 U8.7 | length 177.3
  Top Layer w15: v1(3694.1,3730) 3694.1,3730.31 cw(c3699.22,3730.31) 3695.6,3733.93 ccw(c3691.98,3737.55) 3697.1,3737.55 3697.1,3766.09 cw(c3738.7,3766.09) U6.5@3709.28,3795.51
  Bottom Layer w15: v1(3694.1,3730) 3694.1,3721.97 ccw(c3725.17,3721.97) R5.2@3703.2,3700 ; R5.2@3696.15,3695.45 ccw(c3707.13,3684.47) 3691.6,3684.47 3691.6,3676.92 ccw(c3714.48,3676.92) 3698.3,3660.74 cw(c3682.12,3644.57) 3705,3644.57 U8.7@3705,3625
FDCAN3_RX: U4.30 U8.4 | length 234.2
  Top Layer w10: U4.30@3486.96,3574.53 U4.30@3486.61,3574.88 3486.61,3542.32 ccw(c3532.32,3542.32) v1(3500,3510) v1@3500,3513.79
  Bottom Layer w10: v1(3500,3510) 3530.25,3479.75 ccw(c3553.79,3503.28) 3553.79,3470 cw(c3553.79,3418.79) 3590,3455 cw(c3553.79,3418.79) 3605,3418.79 U8.4@3605,3406.7
FDCAN3_TX: U4.39 U8.1 | length 649.7
  Top Layer w10: U4.39@3299.61,3466.61 3354.6,3466.61 3358.58,3462.63 v1(3362.37,3462.63)
  Bottom Layer w10: v1@3370.94,3462.63 v1(3362.37,3462.63) 3520.71,3304.29 ccw(c3591.42,3375) 3591.42,3275 3705.96,3275 ccw(c3705.96,3324.04) 3755,3324.04 U8.1@3755,3406.7